# Altium PCB PCB1.PcbDoc (part 1 of 3)
Units mil, origin at the board's own origin, x right, y up, seen from the top; angles counter-clockwise.
Board outline 3550 x 3015 mil, 5 copper layers (Top Layer, GND, Layer 1, Layer 2, Bottom Layer), stack 19.334 mil thick; 291 components, 192 nets, 917 pads, 203 vias.
Unrouted connection lines stored in the file: 51.
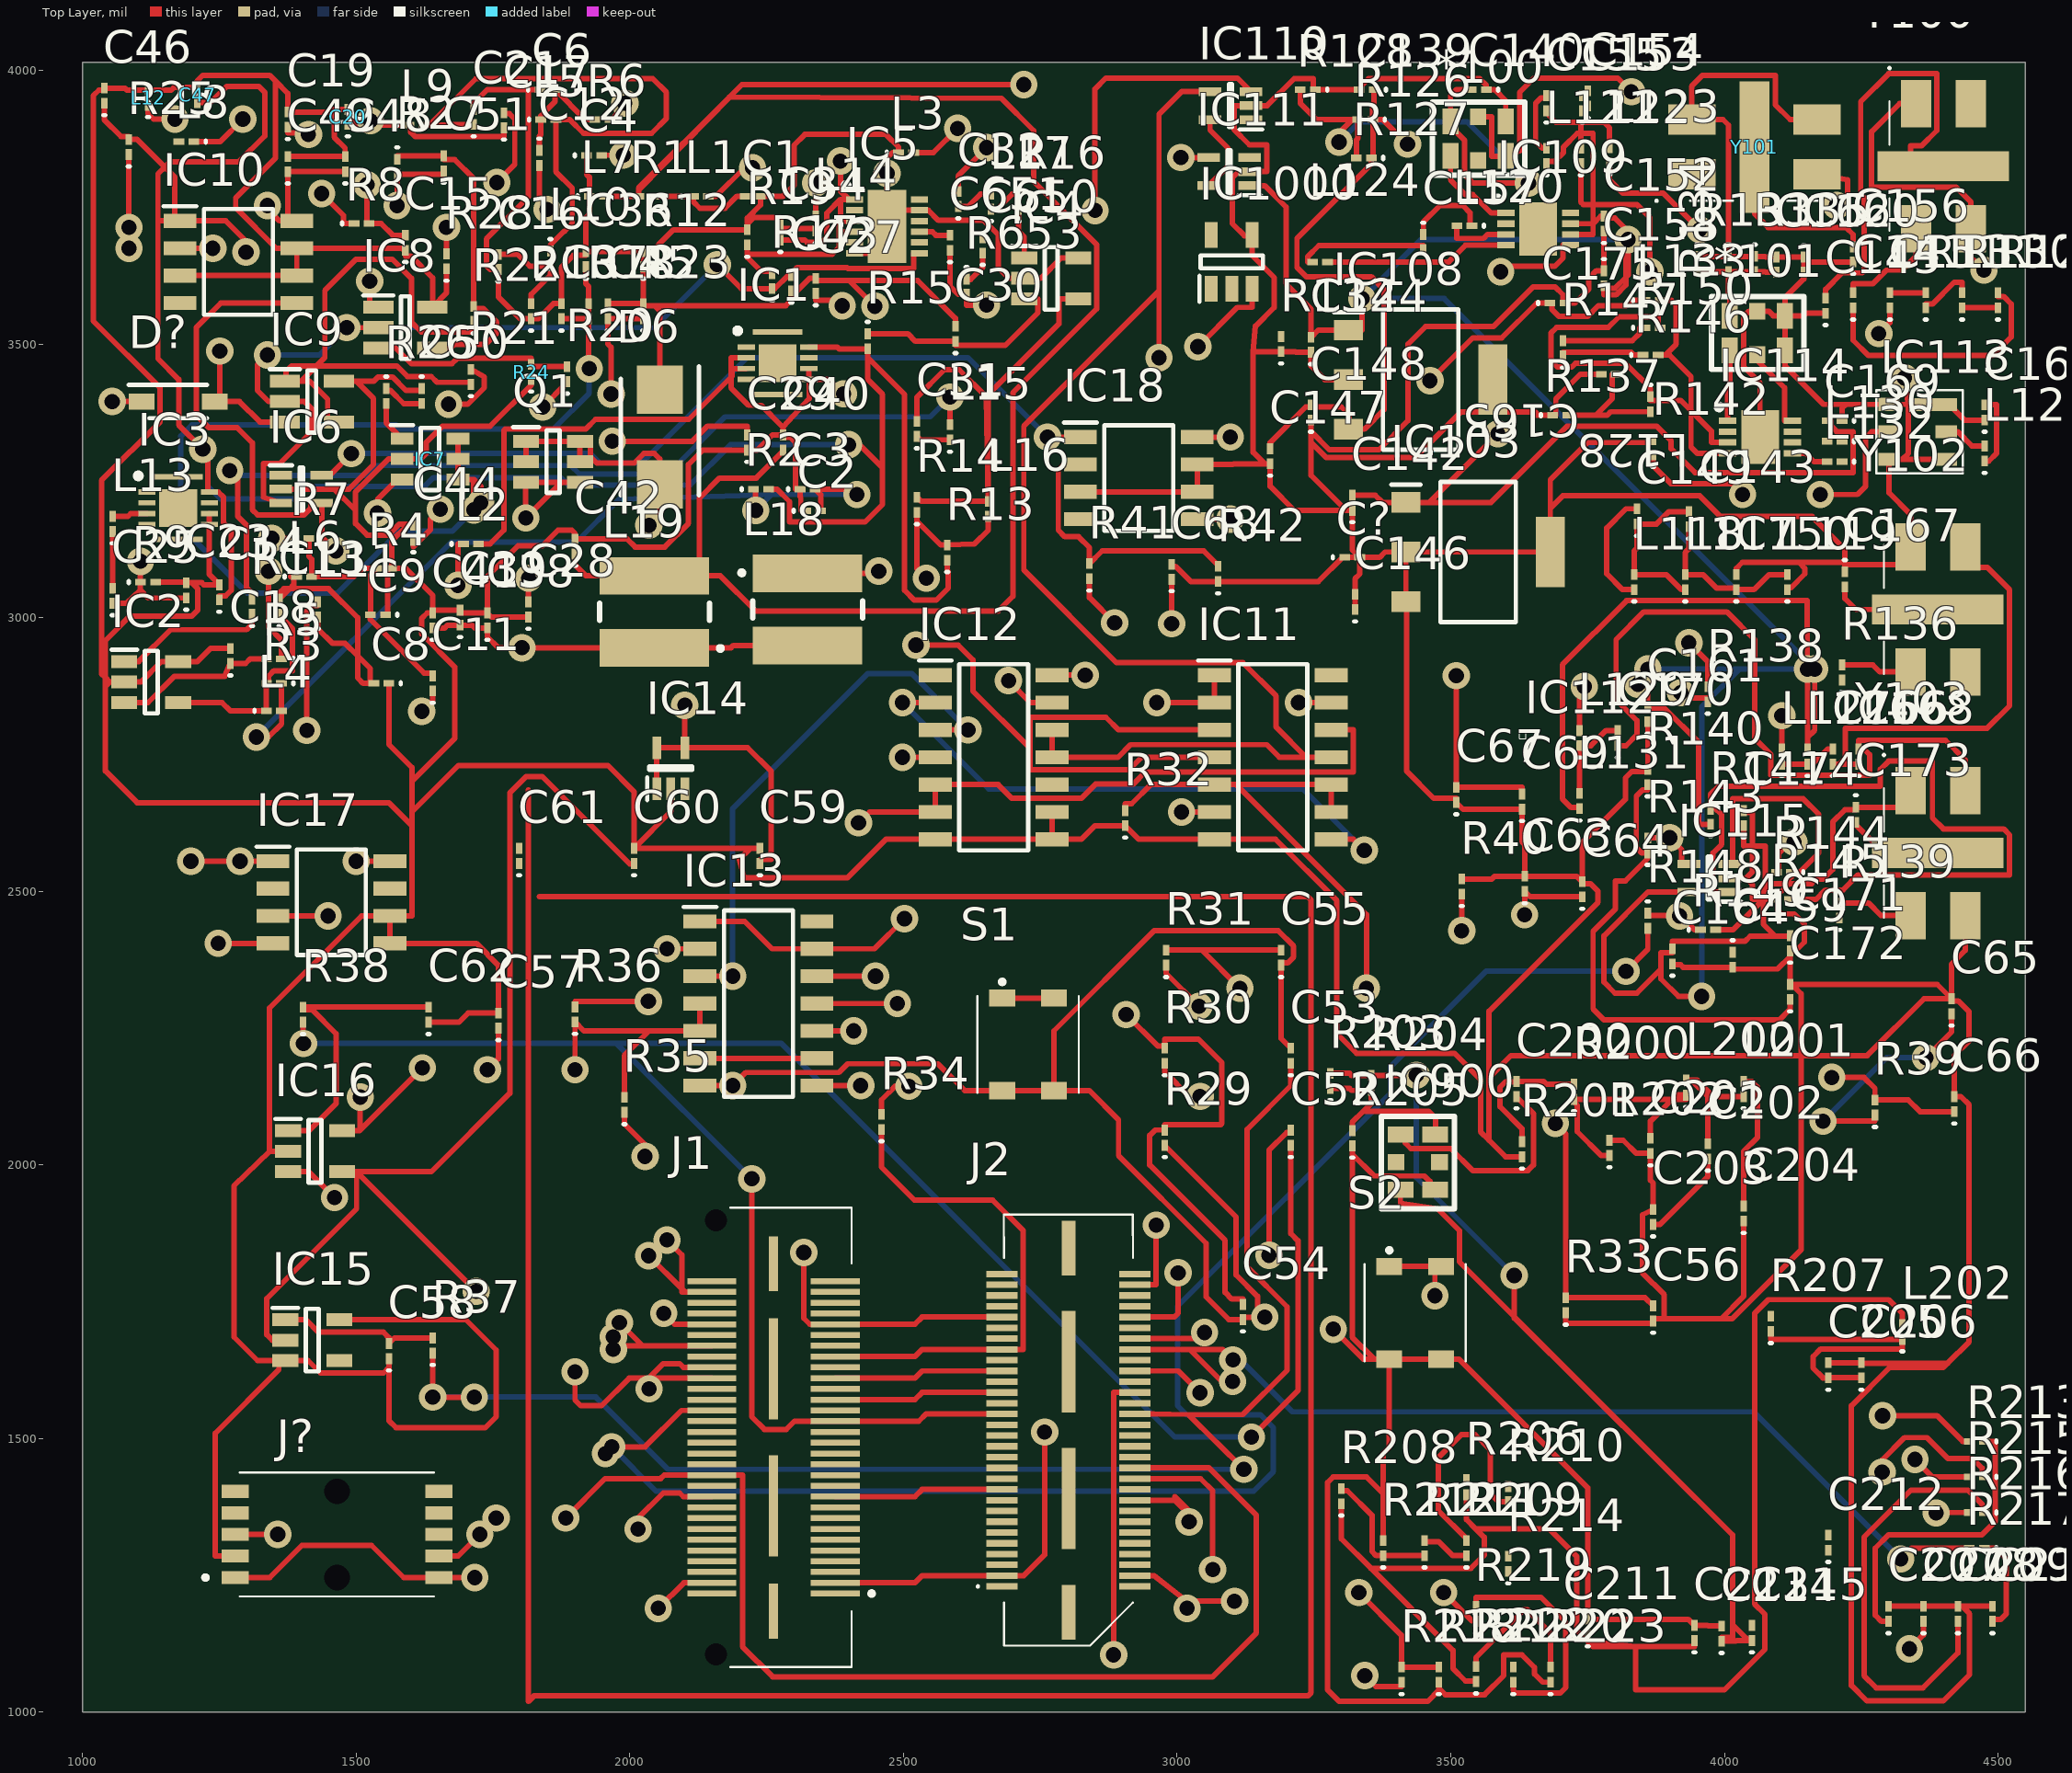
[diagram p0: Top Layer view]
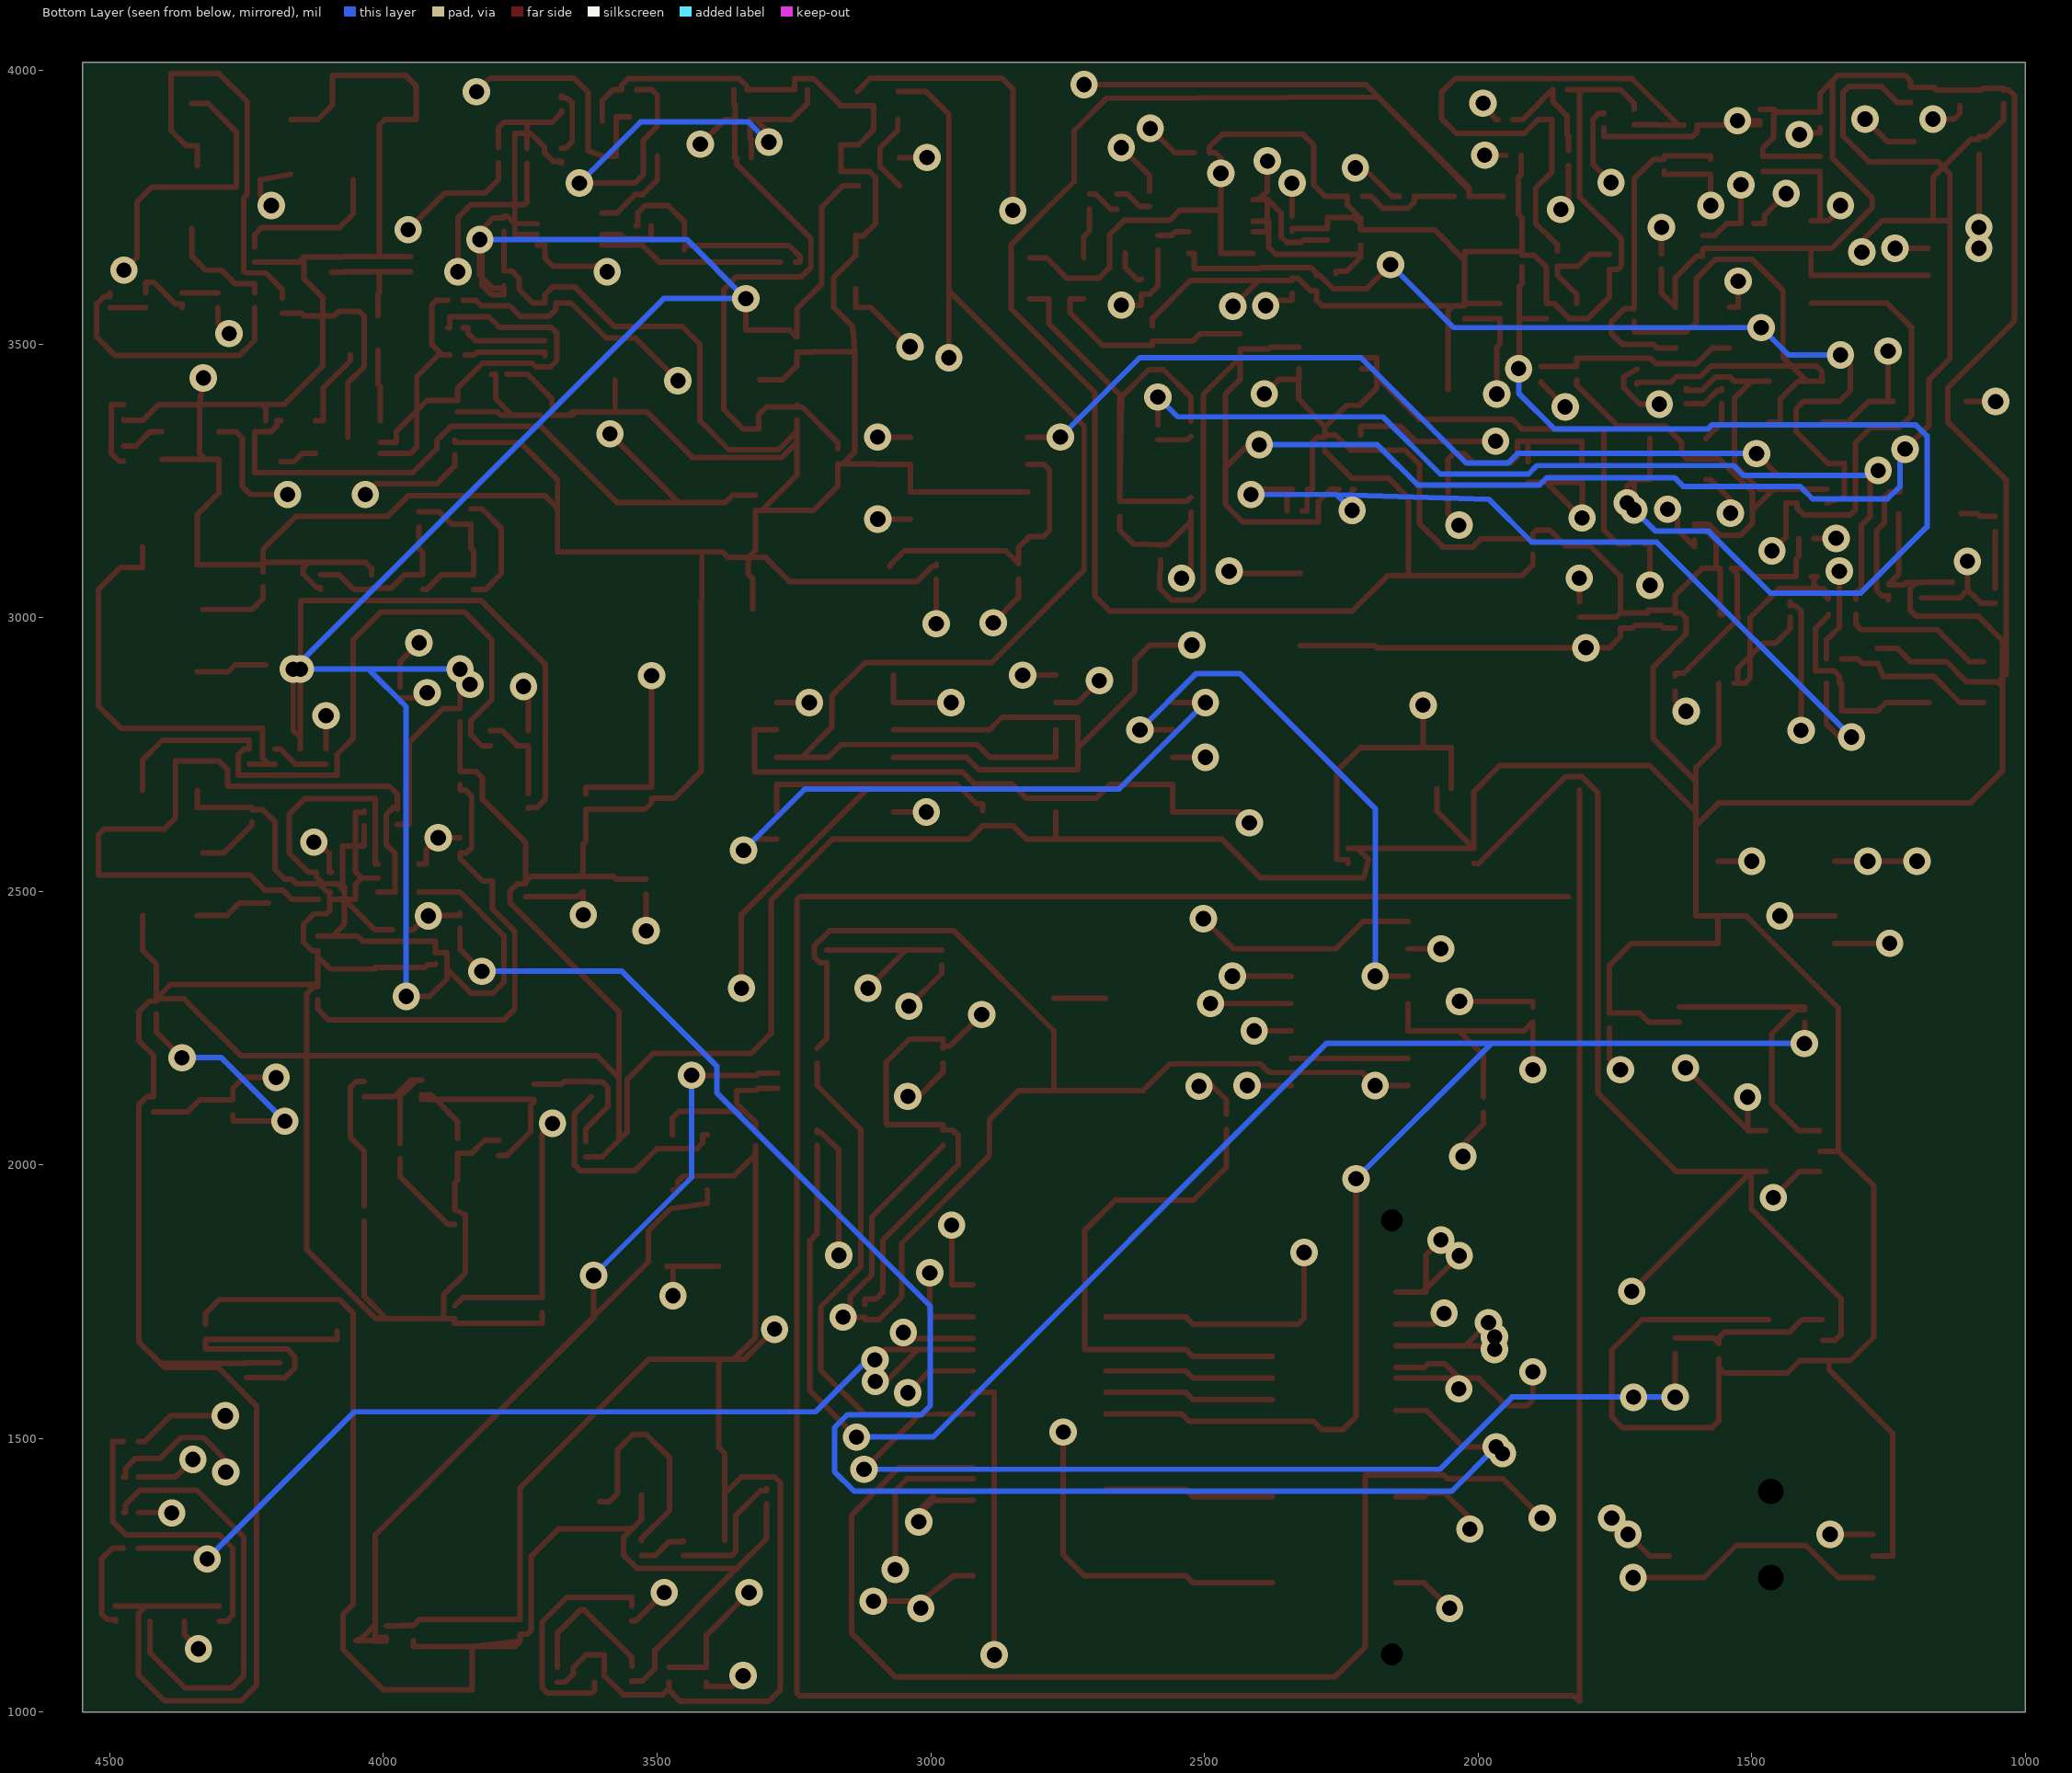
[diagram p1: Bottom Layer view, seen from below]
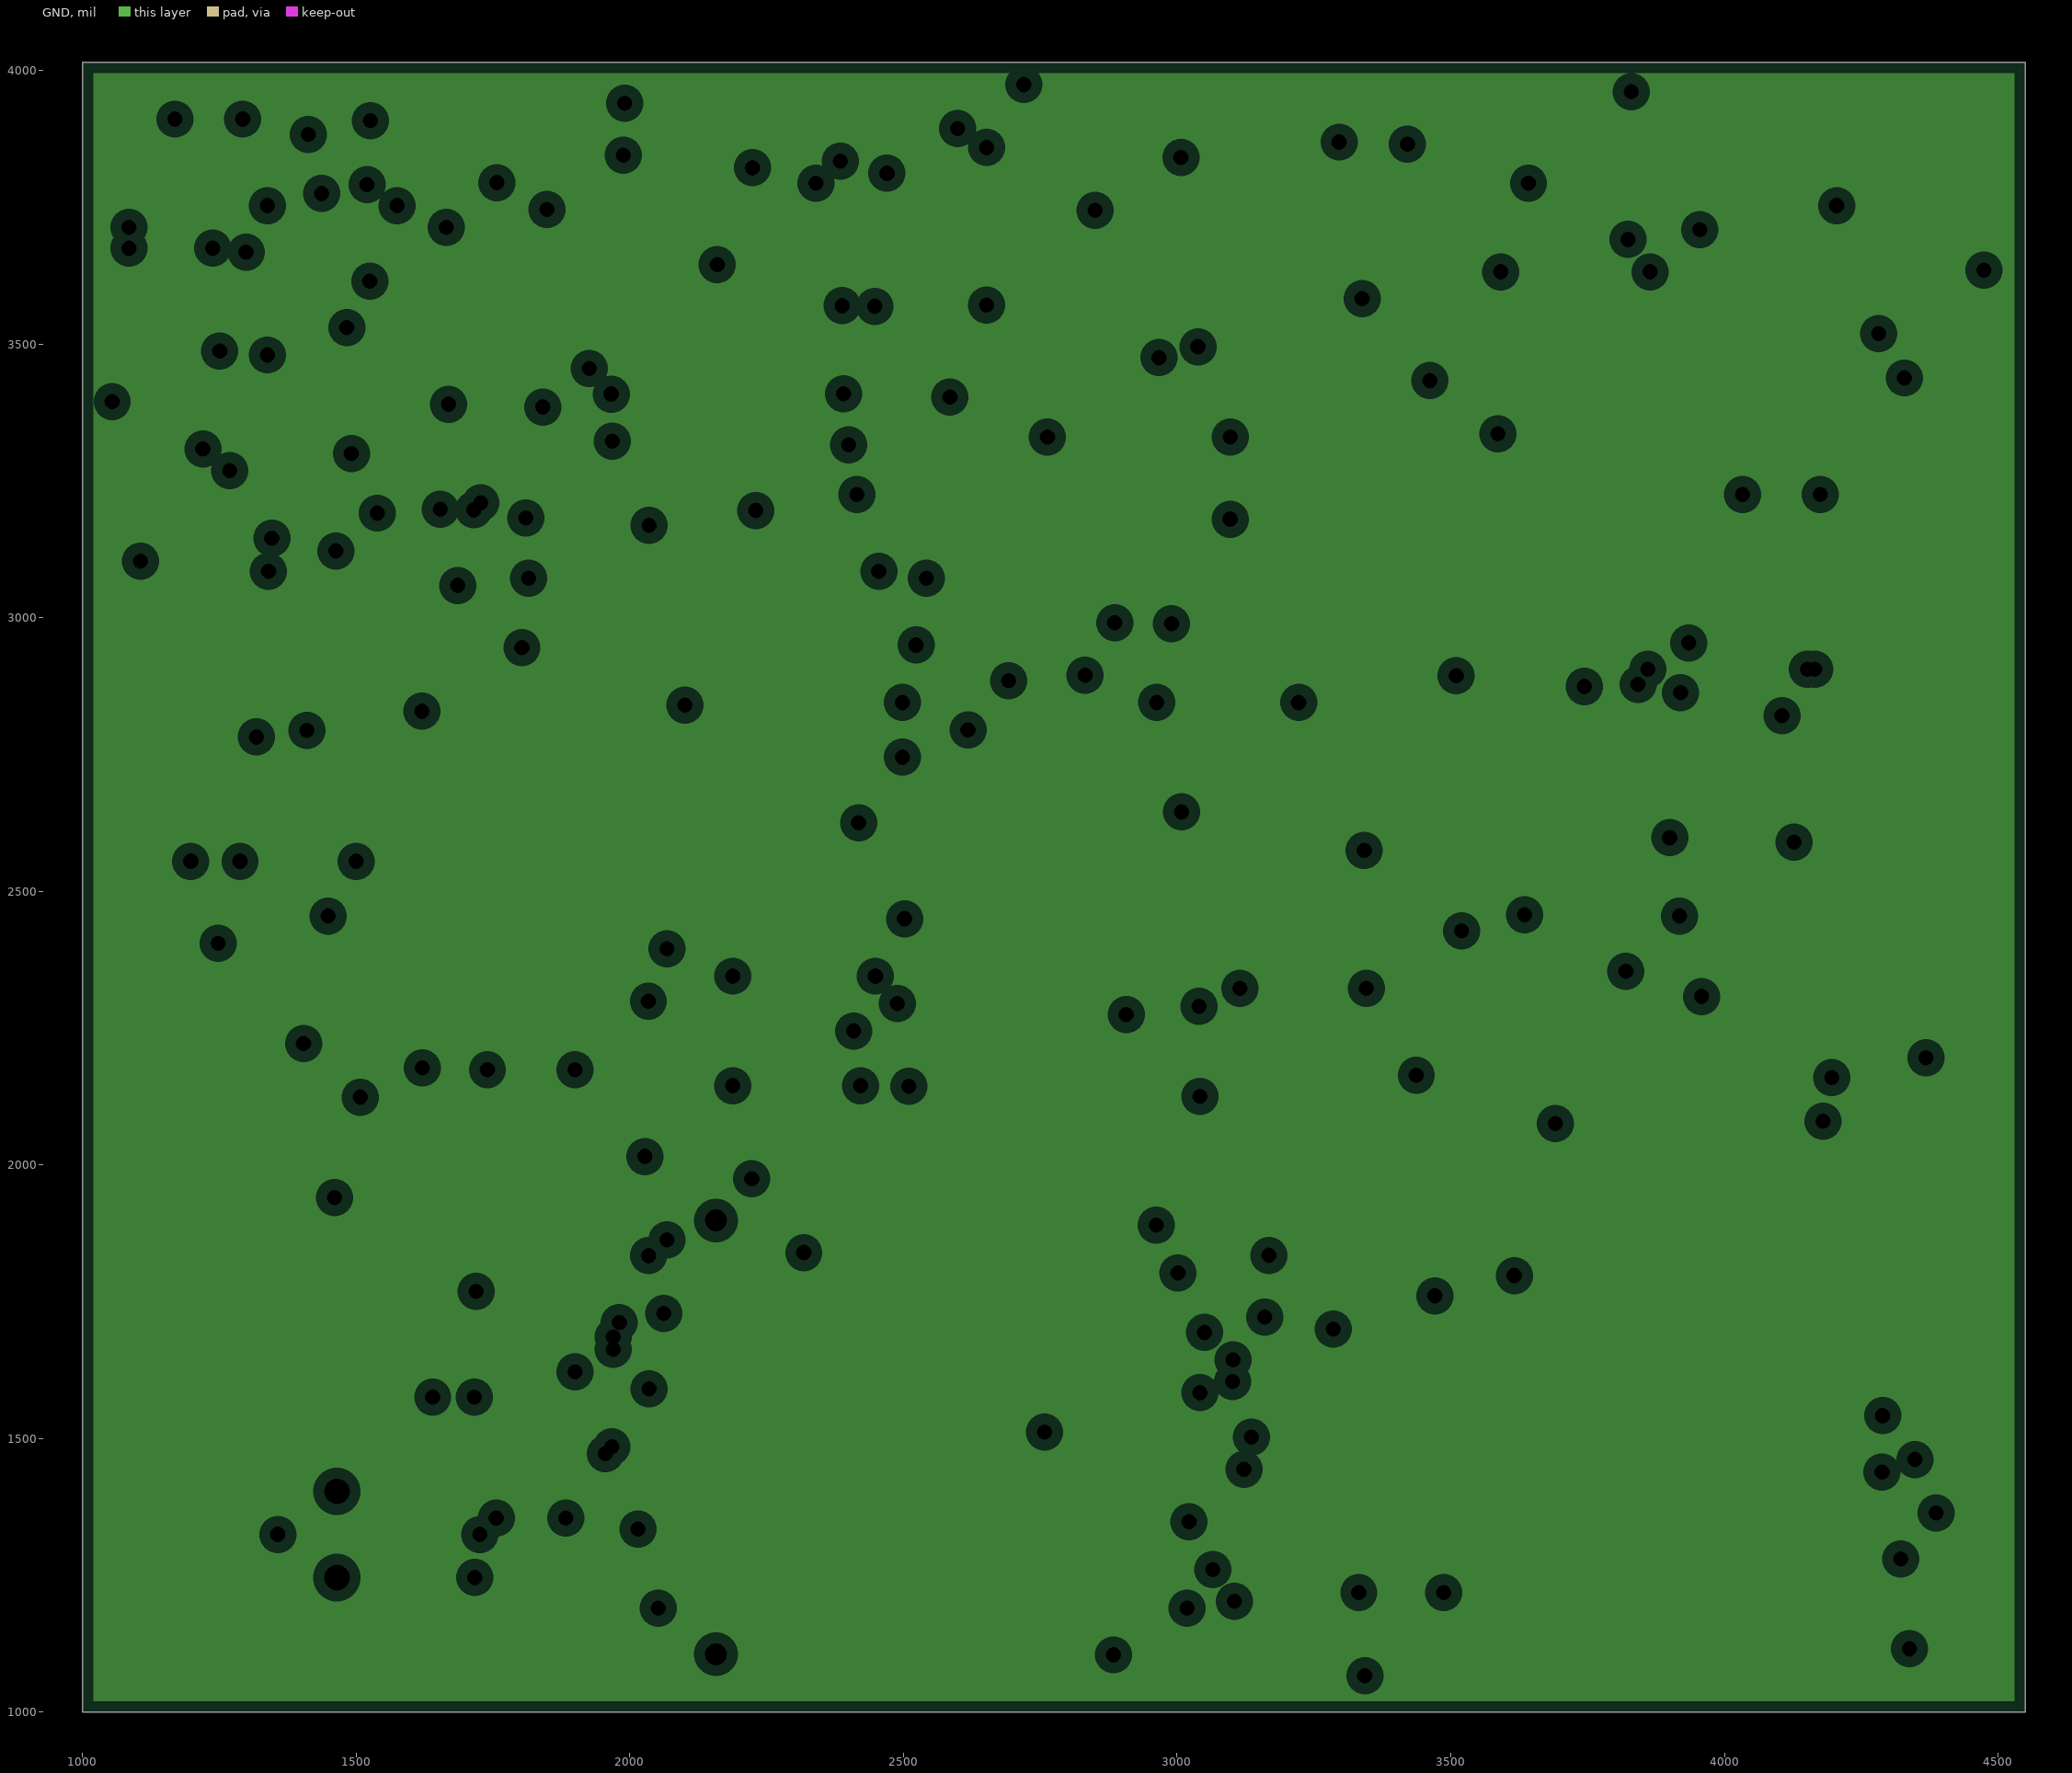
[diagram p2: GND, clearances drawn from the general rule]
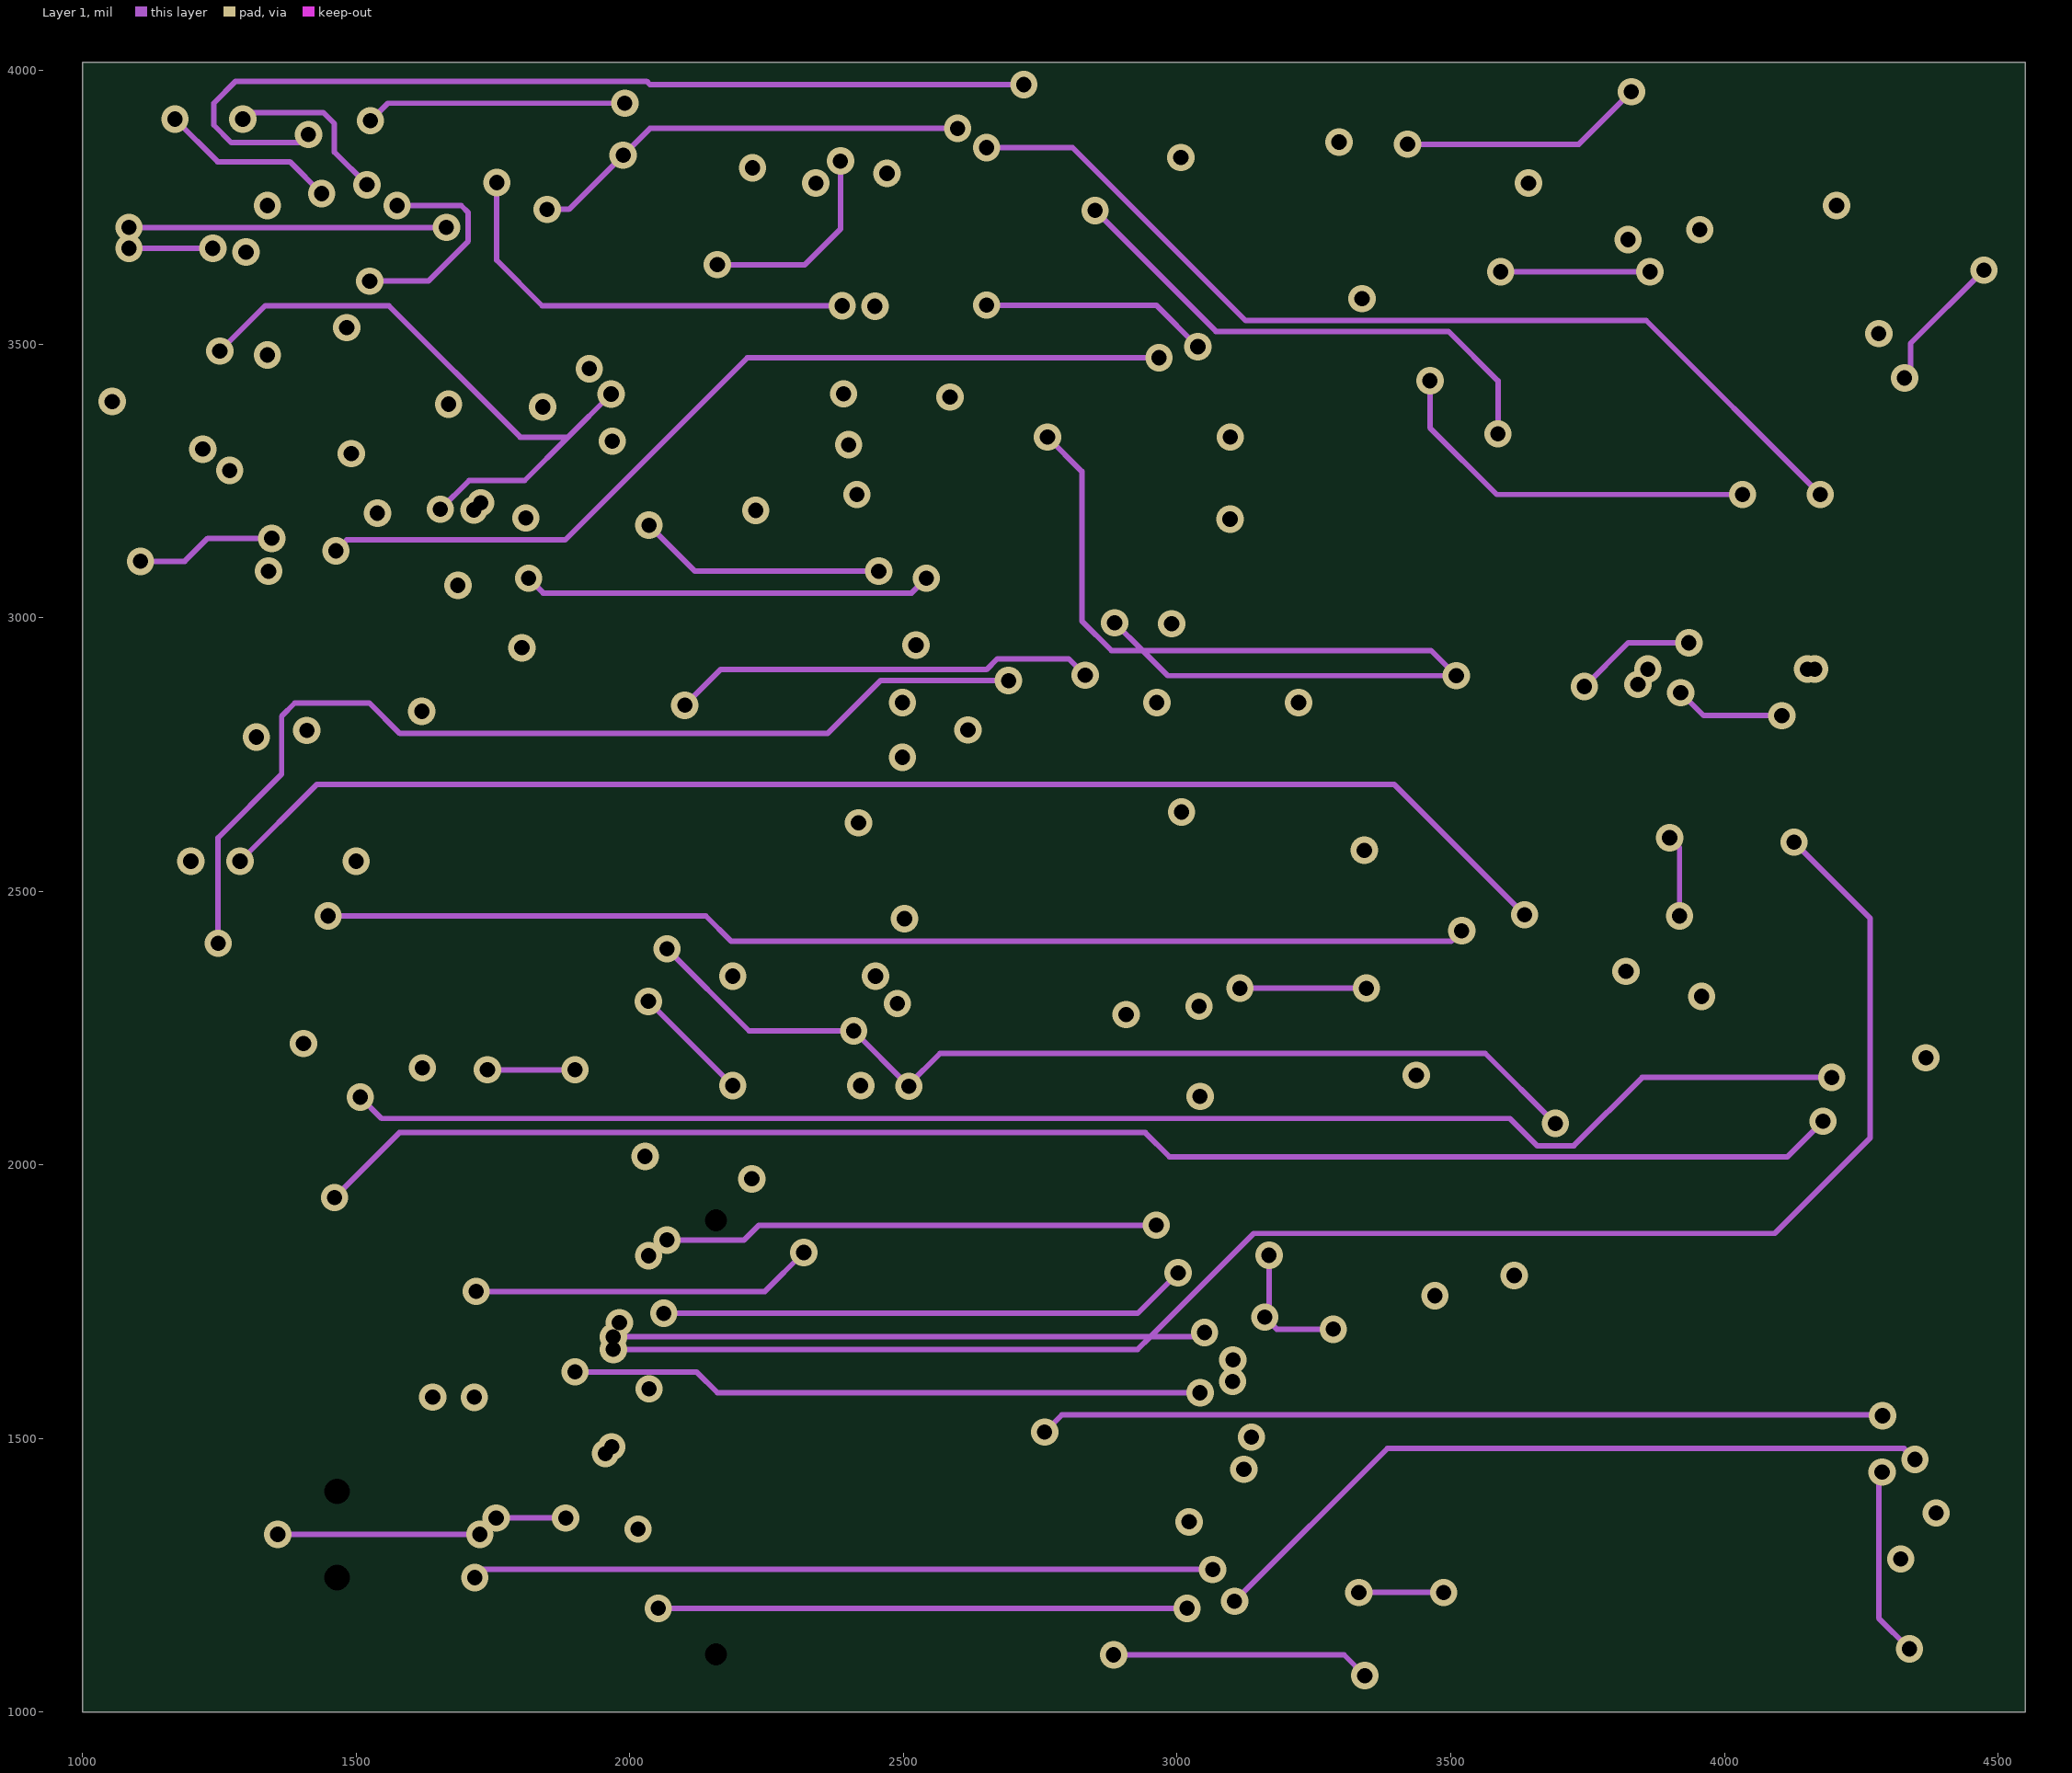
[diagram p3: Layer 1]
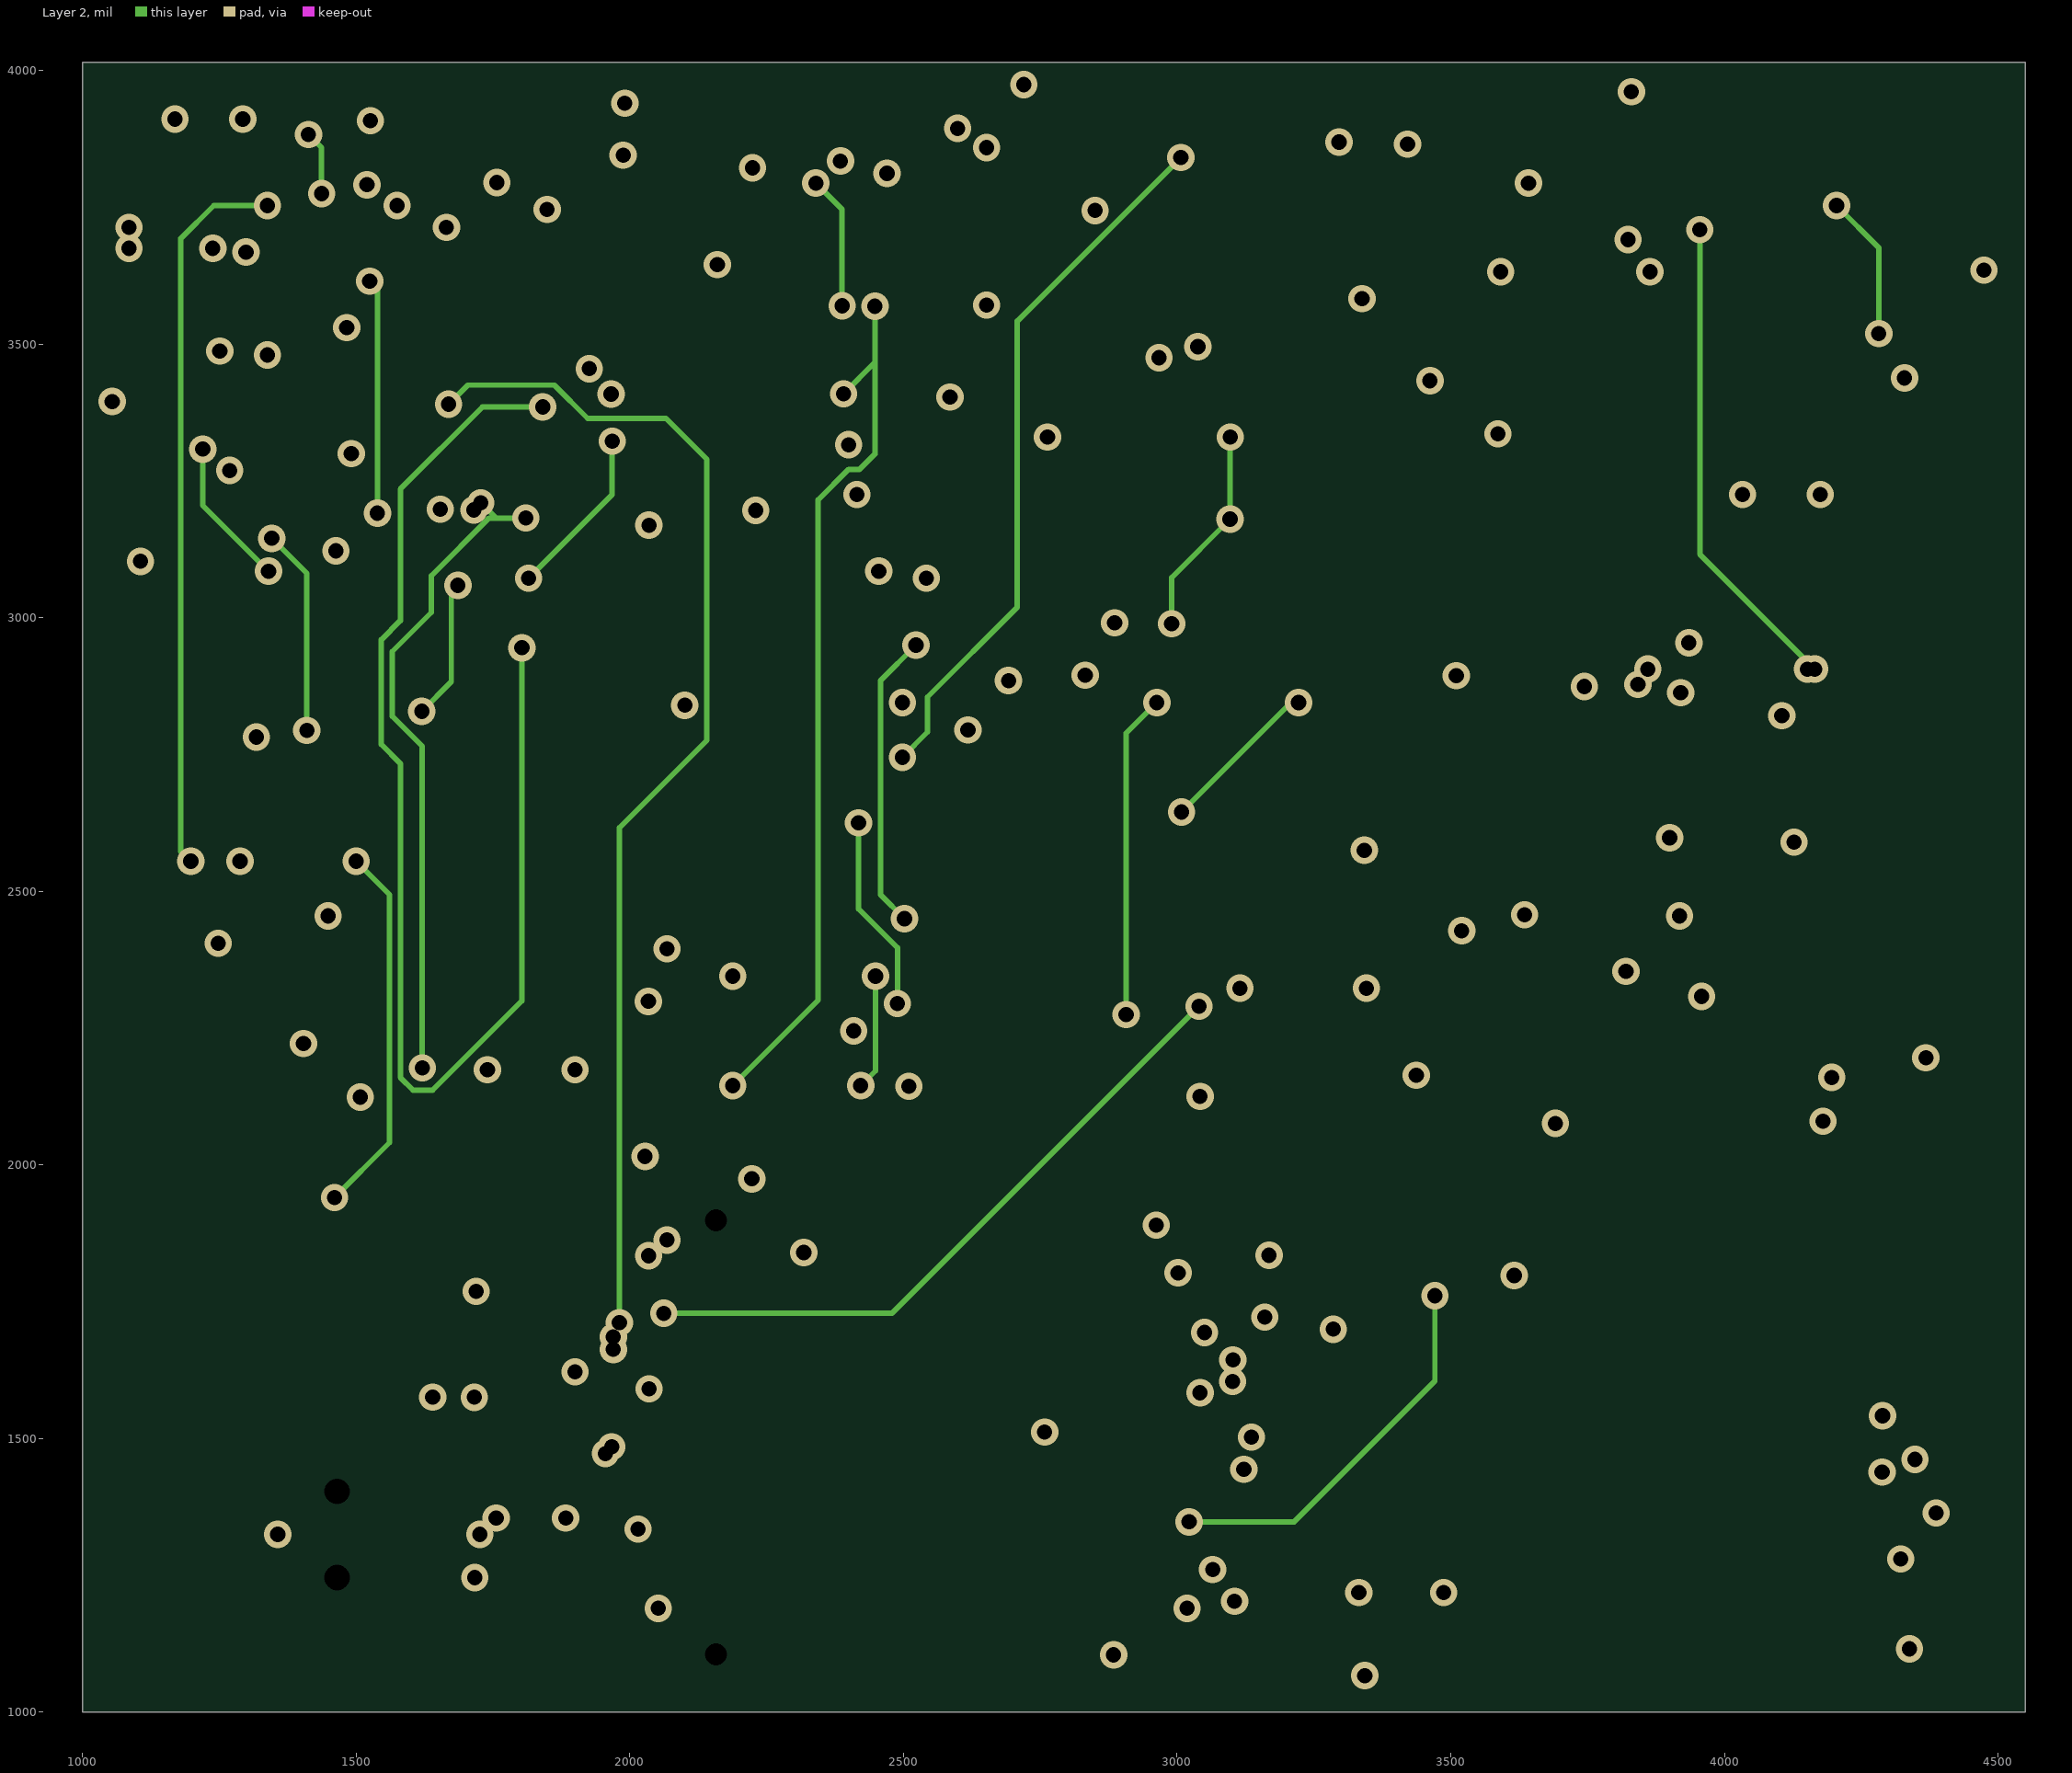
[diagram p4: Layer 2]

## Layer stack, top to bottom
Top Solder: solder mask 0.4, Solder Resist, Dk 3.5
Top Layer: signal copper 1.4
Dielectric 2: prepreg 2.8, PP-006, Dk 4.1
GND: plane copper 1.378
Dielectric 1: core 4, Core-009, Dk 4.5
Layer 1: signal copper 1.378
Dielectric 4: prepreg 2.8, PP-006, Dk 4.1
Layer 2: signal copper 1.378
Dielectric 5: prepreg 2.8, PP-006, Dk 4.1
Bottom Layer: signal copper 1.4
Bottom Solder: solder mask 0.4, Solder Resist, Dk 3.5

## Board outline
1000,1000 4550,1000 4550,4015 1000,4015

## Design rules (kind name [scope] priority, off if disabled: settings)
Clearance [All] p1: gap=10 ignorepadtopadclearanceinfootprint=FALSE except(0: Arc-Hole Track-Hole SMDPad-Hole THPad-Hole Via-Hole Fill-Hole Poly-Hole Region-Hole Text-Hole; 5: Arc-SMDPad Track-SMDPad SMDPad-SMDPad)
DiffPairsRouting [All] p1: maxlimit=10 minlimit=1 mostfreqgap=10 toplayer_minwidth=1 toplayer_maxwidth=15 toplayer_prefwidth=15 midlayer1_minwidth=1 midlayer1_maxwidth=15 midlayer1_prefwidth=15 midlayer2_minwidth=1 midlayer2_maxwidth=15 midlayer2_prefwidth=15 bottomlayer_minwidth=1 bottomlayer_maxwidth=15 bottomlayer_prefwidth=15 maxuncoupledlength=500
PlaneClearance [All] p1: clearance=20
PlaneConnect [All] p1: planeconnectstyle=Relief reliefexpansion=20 reliefentries=4 reliefconductorwidth=10 reliefairgap=10
PolygonConnect [All] p1: connectstyle=Relief reliefconductorwidth=10 reliefentries=4 polygonreliefangle="90 Angle" airgapwidth=10
RoutingVias [All] p1: holewidth=28 width=50 viastyle="Through Hole" minholewidth=28 minwidth=50 maxholewidth=28 maxwidth=50
SolderMaskExpansion [All] p1: expansion=4 istentingtop=FALSE
Width [All] p1: maxlimit=10 minlimit=10 preferedwidth=10
27 further rules are at their usual default settings.

## Classes and differential pairs
component class TELEMETRY: C200 C201 C202 C203 C204 C205 C206 C207 C208 C209 C210 C211 C212 C213 C214 C215 IC200 IC201 IC202 IC203 IC900 L200 L201 L202 R200 R201 R202 R203 R204 R205 R206 R207 R208 R209 R210 R211 R212 R213 R214 R215 R216 R217 R218 R219 R220 R221 R222 R223
component class Sheet1: C52 C53 C54 C55 C56 C57 C58 C59 C60 C61 C62 C63 C64 C65 C66 C67 C68 C69 IC11 IC12 IC13 IC14 IC15 IC16 IC17 IC18 J1 J2 J? R29 R30 R31 R32 R33 R34 R35 R36 R37 R38 R39 R40 R41 R42 S1 S2
component class PA: C1 C2 C3 C4 C6 C8 C9 C11 C12 C13 C14 C15 C16 C17 C18 C19 C20 C21 C23 C25 C27 C28 C29 C30 C31 C32 C34 C36 C37 C38 C39 C40 C41 C42 C43 C44 C45 C46 C47 C48 C49 C50 C51 C650 C651 D6 D? IC1 IC2 IC3 IC4 IC5 IC6 IC7 IC8 IC9 IC10 L1 L2 L3 L4 L5 L6 L7 L8 L9 L10 L11 L12 L13 L14 L15 L16 L17 L18 L19 Q1 R1 R2 R3 R4 R5 R6 R7 R8 R9 R10 R11 R12 R13 R14 R15 R16 R17 R18 R19 R20 R21 R22 R23 R24 R25 R26 R27 R28 R653
component class "Mixers and IF": *100 *101 C139 C140 C141 C142 C143 C144 C145 C146 C147 C148 C149 C150 C151 C152 C153 C154 C155 C156 C157 C158 C159 C160 C161 C162 C163 C164 C165 C166 C167 C168 C169 C170 C? IC103 IC108 IC109 IC110 IC111 IC112 IC113 IC114 L117 L118 L119 L120 L121 L122 L123 L124 L125 L126 L127 L128 L129 L130 L131 R126 R127 R128 R129 R130 R131 R132 R133 R134 R135 R136 R137 R138 Y100 Y101 Y102 Y103

## Components (designator, comment, footprint, x,y, rotation, side; value= is the part's Value field where it differs from the comment)
*100 "MQF326D REp" MQF326D 3600.27,3907.17 r180 top
*101 "MQF326D REp" MQF326D 4110.27,3552.17 r180 top
C1 "Cap" 0603 2225,3770 r180 top value=33pF
C2 "Cap" 0603 2335,3195 r0 top value=1uF
C3 "Cap" 0603 2325,3235 r0 top value=470pF
C4 "Cap" 0603 1935,3845 r0 top value=12pF
C6 "Cap" 0603 1850,3965 r0 top value=5.1pF
C8 "Cap" 0603 1546.22,2880 r180 top value=10pF
C9 "Cap" 0603 1540,3005 r180 top value=5.1pF
C11 "Cap" 0603 1640,2880 r90 top value=470pF
C12 "Cap" 0603 1835,3840 r270 top value=470pF
C13 "Cap" 0603 1360,3020 r90 top value=470pF
C14 "Cap" 0603 1250,3046.22 r90 top value=10nF
C15 "Cap" 0603 1590,3685 r90 top value=33pF
C16 "Cap" 0603 1760,3650 r90 top value=6.8pF
C17 "Cap" 0603 1770,3908.78 r90 top value=470pF
C18 "Cap" 0603 1270,2930 r90 top value=470pF
C19 "Cap" 0603 1375,3910 r90 top value=470pF
C20 "Cap" 0603 1485,3915 r90 top value=5.1pF
C21 "Cap" 0603 1715,3915 r90 top value=16pF
C23 "Cap" 0603 1190,3050 r90 top value=5.1pF
C25 "Cap" 0603 1055,3040 r90 top value=470pF
C27 "Cap" 0603 2340,3606.22 r90 top value=12pF
C28 "Cap" 0603 1815,3015 r90 top value=470pF
C29 "Cap" 0603 2215,3320 r90 top value=1uF
C30 "Cap" 0603 2595,3518.78 r90 top value=470pF
C31 "Cap" 0603 2525,3345 r90 top value=470pF
C32 "Cap" 0603 2600,3765 r90 top value=470pF
C34 "Cap" 0603 2275,3703.78 r90 top value=1uF
C36 "Cap" 0603 1920,3655 r90 top value=4.7uF
C37 "Cap" 0603 1875,3560 r90 top value=4.7uF
C38 "Cap" 0603 1740,2995 r90 top value=22uF
C39 "Cap" 0603 1690,3000 r90 top value=22uF
C40 "Cap" 0603 2280,3320 r90 top value=47uF
C41 "Cap" 0603 1640,2995 r90 top value=.1uF
C42 "Cap" 0603 1900,3130 r90 top value=47uF
C43 "Cap" 0603 2295,3611.22 r90 top value=1uF
C44 "Cap" 0603 1605,3155 r90 top value=4.7uF
C45 "Cap" 0603 1960,3560 r90 top value=4.7uF
C46 "Cap" 0603 1040,3953.78 r90 top value=4.7uF
C47 "Cap" 0603 1210,3955 r90 top value=4.7uF
C48 "Cap" 0603 1480,3828.78 r90 top value=1uF
C49 "Cap" 0603 1375,3828.78 r90 top value=470pF
C50 "Cap" 0603 1620,3405 r270 top value=220pF
C51 "Cap" 0603 1660,3830 r90 top value=.1uF
C52 "Cap" 0603 3207.76,2049.65 r90 top value=470pF
C53 "Cap" 0603 3207.76,2199.65 r90 top value=470pF
C54 "Cap" 0603 3120,1731.22 r90 top value=470pF
C55 "Cap" 0603 3190,2378.78 r90 top value=470pF
C56 "Cap" 0603 3870,1728.78 r90 top value=470pF
C57 "Cap" 0603 1760,2263.78 r90 top value=470pF
C58 "Cap" 0603 1560,1660 r90 top value=470pF
C59 "Cap" 0603 2237.76,2564.65 r90 top value=.1uF
C60 "Cap" 0603 2007.76,2564.65 r90 top value=.1uF
C61 "Cap" 0603 1797.76,2564.65 r90 top value=.1uF
C62 "Cap" 0603 1632.76,2274.65 r90 top value=470pF
C63 "Cap" 0603 3635,2513.78 r90 top value=4.7uF
C64 "Cap" 0603 3740,2503.78 r90 top value=4.7uF
C65 "Cap" 0603 4415,2290 r90 top value=.1uF
C66 "Cap" 0603 4420,2111.22 r90 top value=.1uF
C67 "Cap" 0603 3510,2676.22 r90 top value=4.7uF
C68 "Cap" 0603 2990,3083.78 r90 top value=1uF
C69 "Cap" 0603 3630,2663.78 r90 top value=4.7uF
C139 "Cap" 0603 3346.22,3965 r180 top value=470pF
C140 "Cap" 0603 3551.22,3965 r180 top value=1nF
C141 "Cap" 0603 4235,3580 r90 top value=470pF
C142 "Cap" 0603 3320,3210 r90 top value=1nF
C143 "Cap" 0603 3935,3180 r90 top value=16pF
C144 "Cap" 0603 3245,3498.78 r90 top value=1nF
C145 "Cap" 0603 4185,3570 r90 top value=1.8pF
C146 "Cap" 0603 3325,3028.78 r90 top value=4.7uF
C147 "Cap" 0603 3170,3295 r90 top value=4.7uF
C148 "Cap" 0603 3245,3375 r90 top value=4.7uF
C149 "Cap" 0603 3840,3185 r90 top value=82pF
C150 "Cap" 0603 4021.67,3065 r90 top value=82pF
C151 "Cap" 0603 4302,3580 r90 top value=470pF
C152 "Cap" 0603 3780,3720 r90 top value=1nF
C153 "Cap" 0603 3740,3940 r90 top value=470pF
C154 "Cap" 0603 3750,3948.78 r90 top value=470pF
C155 "Cap" 0603 3675,3940 r90 top value=.5pF
C156 "Cap" 0603 4235,3663.78 r90 top value=1.8pF
C157 "Cap" 0603 3450,3686.22 r270 top value=22pF
C158 "Cap" 0603 3780,3620 r270 top value=1nF
C159 "Cap" 0603 4015,2375 r270 top value=470pF
C160 "Cap" 0603 4145,3645 r270 top value=470pF
C161 "Cap" 0603 3860,2823.78 r90 top value=1.8pF
C162 "Cap" 0603 4095,3645 r270 top value=1nF
C163 "Cap" 0603 4475,3375 r90 top value=3.9pF
C164 "Cap" 0603 3905,2381.22 r90 top value=1nF
C165 "Cap" 0603 3788.78,3445 r0 top value=1nF
C166 "Cap" 0603 4198.33,2746.22 r90 top value=470pF
C167 "Cap" 0603 4220,3070 r270 top value=1.8pF
C168 "Cap" 0603 4245,2746.22 r90 top value=1.2pF
C169 "Cap" 0603 4201.22,3360 r180 top value=1nF
C170 "Cap" 0603 3805,2780 r90 top value=470pF
C171 "Cap" 0603 4120,2405 r90 top value=1nF
C172 "Cap" 0603 4120,2316.22 r90 top value=1nF
C173 "Cap" 0603 4240,2640 r270 top value=1.8pF
C174 "Cap" 0603 4035,2633.78 r90 top value=1nF
C175 "Cap" 0603 3695,3575 r0 top value=1nF
C200 "Cap" 0603 3620,2138.78 r90 top value=10nF
C201 "Cap" 0603 3865,2035 r90 top value=180pF
C202 "Cap" 0603 3970,2025 r90 top value=560pF
C203 "Cap" 0603 3870,1905 r90 top value=270pF
C204 "Cap" 0603 4035,1911.22 r90 top value=270pF
C205 "Cap" 0603 4190,1625 r90 top value=1nF
C206 "Cap" 0603 4250,1625 r90 top value=4.7uF
C207 "Cap" 0603 4300,1180 r90 top value=2.2pF
C208 "Cap" 0603 4363.33,1180 r90 top value=2.2pF
C209 "Cap" 0603 4426.67,1180 r90 top value=2.2pF
C210 "Cap" 0603 4490,1180 r90 top value=2.2pF
C211 "Cap" 0603 3750,1156.22 r90 top value=1nF
C212 "Cap" 0603 4190,1310 r90 top value=10nF
C213 "Cap" 0603 3945,1145 r90 top value=1nF
C214 "Cap" 0603 3995,1143.78 r90 top value=4.7uF
C215 "Cap" 0603 4050,1145 r90 top value=4.7uF
C650 "Cap" 0603 2645,3680 r90 top value=39pF
C651 "Cap" 0603 2585,3685 r90 top value=39pF
C? "Cap" 0603 3320,3110 r0 top value=4.7uF
D6 "MBRS120T3G" DIOM5436X247N 2055,3330 r270 top
D? "BAT46W-7-F" SOD3716X145N 1175,3395 r0 top
IC1 "RFPA0133TR7" QFN50P300X300X86-17N-D 2270,3465 r0 top
IC2 "RF2878SR" SOT95P280X159-5N 1125.79,2882.4 r0 top
IC3 "RFPA0133TR7" QFN50P300X300X86-17N-D 1175,3200 r0 top
IC4 "RF2878SR" SOT95P280X159-5N 2770,3620 r0 top
IC5 "LTC5533EDE#PBF" SON50P300X400X85-13N-D 2470,3715 r0 top
IC6 "FPF2000" SOT65P210X110-5N 1400,3235 r0 top
IC7 "LTC1772CS6#TRMPBF" SOT95P280X100-6N 1635,3290 r0 top
IC8 "MCP6231UT-E_OT" SOT95P270X145-5N 1590,3530 r0 top
IC9 "MCP6231UT-E_OT" SOT95P270X145-5N 1419.21,3395 r0 top
IC10 "LT1963AES8-3.3#PBF" SOIC127P599X175-8N 1285,3650 r0 top
IC11 "SN74HC00D" SOIC127P600X175-14N 3175,2745 r0 top
IC12 "MM74HC02M" SOIC127P600X175-14N 2665,2745 r0 top
IC13 "SN74HC00D" SOIC127P600X175-14N 2235,2295 r0 top
IC14 "FPF2000" SOT65P210X110-5N 2075,2725 r90 top
IC15 "TMP36GRTZ-REEL7" SOT95P280X145-5N 1420,1680 r0 top
IC16 "INA194AIDBVT" SOT95P280X145-5N 1425,2025 r0 top
IC17 "FPF2700MX" SOIC127P600X175-8N 1455,2480 r0 top
IC18 "LT1963AES8-3.3#PBF" SOIC127P599X175-8N 2930,3255 r0 top
IC103 "LT1963EST-2.5" SOT230P700X180-4N 3550,3120 r0 top
IC108 "LT1963EST-2.5" SOT230P700X180-4N 3445,3435 r0 top
IC109 "LT5560EDD#PBF" SON50P300X300X80-9N-D 3660,3710 r0 top
IC110 "FPF2000" SOT65P210X110-5N 3097.6,3935.59 r180 top
IC111 "FPF2004" SOT65P210X110-5N 3095,3815 r180 top
IC112 "rf2637" RF2637 3630,2783.27 r90 top
IC113 "AFS434S3-T" AFS434S3 4275.7,3262.34 r0 top
IC114 "LT5560EDD#PBF" SON50P300X300X80-9N-D 4065,3330 r0 top
IC115 "MCP6231UT-E_LT" SOT65P210X110-5N 3972.6,2524.41 r180 top
IC900 "MQF326D REp" MQF326D 3471.71,1954.73 r90 top
IC1000 "RF2878SR" SOT95P280X159-5N 3100,3650 r90 top
J1 "QSH-030-01-L-D-A-K" QSH03001LDAK 2262.8,1502.32 r90 top
J2 "QTH-030-02-L-D-A" QTH03002LDA 2801.5,1515.47 r90 top
J? "FSI-105-06-L-D-AD-TR" FSI10506LDADTR 1465,1325 r90 top
L1 "Inductor" 0603 2130,3770 r0 top value=8.7nH
L2 "Inductor" 0603 1710,3135 r0 top value=18nH
L3 "Inductor" 0603 2505,3850 r0 top value=10.4nH
L4 "Inductor" 0603 1350,2830 r0 top value=18nH
L5 "Inductor" 0603 1851.22,3910 r0 top value=25nH
L6 "Inductor" 0603 1405,3075 r0 top value=25nH
L7 "Inductor" 0603 1940,3770 r0 top value=18nH
L8 "Inductor" 0603 1190,3870 r180 top value=8.7nH
L9 "Inductor" 0603 1610,3900 r0 top value=25nH
L10 "Inductor" 0603 1855,3656.22 r270 top value=18nH
L11 "Inductor" 0603 1430,3015 r90 top value=25nH
L12 "Inductor" 0603 1120,3950 r90 top value=18nH
L13 "Inductor" 0603 1055,3171.22 r90 top value=18nH
L14 "Inductor" 0603 2340,3720 r90 top value=10.4nH
L15 "Inductor" 0603 2585,3338.78 r90 top value=39nH
L16 "Inductor" 0603 2655,3198.78 r270 top value=18nH
L17 "Inductor" 0603 2660,3760 r90 top value=39nH
L18 "MSS5131-472MLB" MSS5131 2325,3015 r0 top
L19 "MSS5131-103MLB" MSS5131 2045,3010.75 r180 top
L117 "Inductor" 0603 3928.33,3065 r90 top value=2508_23
L118 "Inductor" 0603 3835,3065 r90 top value=1508_13
L119 "Inductor" 0603 4115,3065 r90 top value=1508_23
L120 "Inductor" 0603 3525,3716.22 r180 top value=18nH
L121 "Inductor" 0603 3675,3843.78 r90 top value=2.7uH
L122 "Inductor" 0603 3737.5,3843.78 r90 top value=2.7uH
L123 "Inductor" 0603 3790,3845 r90 top value=8.2uH
L124 "Inductor" 0603 3261.22,3650 r180 top value=18nH
L125 "Inductor" 0603 4475,3300 r90 top value=8.2nH
L126 "Inductor" 0603 4151.67,2746.22 r90 top value=8.2uH
L127 "Inductor" 0603 4105,2746.22 r90 top value=2.2uH
L128 "Inductor" 0603 3865,3390 r270 top value=1.5uH
L129 "Inductor" 0603 3735,2780 r90 top value=2.2uH
L130 "Inductor" 0603 4201.22,3322.5 r180 top value=68nH
L131 "Inductor" 0603 3735,2665 r90 top value=8.2uH
L132 "Inductor" 0603 4201.22,3285 r180 top
L133 "Inductor" 0603 3868.78,3580 r0 top value=1.5uH
L200 "Inductor" 0603 3930,2141.22 r90 top value=120nH
L201 "Inductor" 0603 4035,2138.78 r90 top value=47nH
L202 "Inductor" 0603 4325,1695 r90 top value=330nH
Q1 "FDC638P" SOT95P280X110-6N 1860,3285 r0 top
R1 "Res1" 0603 2030,3770 r0 top value=10
R2 "Res1" 0603 2240,3235 r0 top value=560
R3 "Res1" 0603 1350,2880 r180 top value=510
R4 "Res1" 0603 1551.22,3090 r0 top value=200
R5 "Res1" 0603 1350,2925 r180 top value=1.8k
R6 "Res1" 0603 1950,3910 r0 top value=100
R7 "Res1" 0603 1400,3145 r180 top value=100
R8 "Res1" 0603 1510,3720 r0 top value=10
R9 "Res1" 0603 1120,3065 r0 top value=200
R10 "Res1" 0603 1820,3560 r90 top value=1.5k
R11 "Res1" 0603 1310,3020 r90 top value=15
R12 "Res1" 0603 2025,3655 r90 top value=49.9
R13 "Res1" 0603 2580,3118.78 r90 top value=1.2k
R14 "Res1" 0603 2525,3206.22 r90 top value=510
R15 "Res1" 0603 2435,3505 r270 top value=2k
R16 "Res1" 0603 2710,3760 r90 top value=15
R17 "Res1" 0603 2260,3615 r90 top value=68k
R18 "Res1" 0603 1925,3560 r90 top value=.03
R19 "Res1" 0603 2215,3695 r90 top value=12k
R20 "Res1" 0603 1885,3445 r90 top value=100k
R21 "Res1" 0603 1710,3440 r90 top value=4.7k
R22 "Res1" 0603 1715,3555 r90 top value=1.8k
R23 "Res1" 0603 2025,3560 r90 top value=470k
R24 "Res1" 0603 1820,3448.78 r90 top value=200k
R25 "Res1" 0603 1085,3860 r90 top value=5.11k
R26 "Res1" 0603 1555,3405 r270 top value=10k
R27 "Res1" 0603 1575,3823.78 r270 top value=300k
R28 "Res1" 0603 1665,3651.22 r90 top value=3.83k
R29 "Res1" 0603 2977.76,2049.65 r90 top value=1M
R30 "Res1" 0603 2977.76,2199.65 r90 top value=100
R31 "Res1" 0603 2980,2378.78 r90 top value=100
R32 "Res1" 0603 2905,2633.78 r90 top value=1M
R33 "Res1" 0603 3710,1743.78 r90 top value=1M
R34 "Res1" 0603 2460,2078.78 r90 top value=100
R35 "Res1" 0603 1990,2110 r90 top value=100
R36 "Res1" 0603 1900,2275 r90 top value=1M
R37 "Res1" 0603 1640,1670 r90 top value=100
R38 "Res1" 0603 1402.76,2274.65 r90 top value=100
R39 "Res1" 0603 4275,2105 r90 top value=.1
R40 "Res1" 0603 3520,2508.78 r90 top value=430k
R41 "Res1" 0603 2840,3085 r90 top value=5.76k
R42 "Res1" 0603 3075,3080 r90 top value=3.83k
R126 "Res1" 0603 3343.78,3910 r180 top value=TBD
R127 "Res1" 0603 3341.22,3840 r180 top value=10k
R128 "Res1" 0603 3238.78,3965 r180 top value=15k
R129 "Res1" 0603 4500,3580 r90 top value=470
R130 "Res1" 0603 4434,3580 r90 top value=2.2k
R131 "Res1" 0603 4368,3580 r90 top value=470
R132 "Res1" 0603 3190,3500 r90 top value=3
R133 "Res1" 0603 3950,3646.22 r270 top value=TBD
R134 "Res1" 0603 4007.5,3646.22 r270 top value=15k
R135 "Res1" 0603 4055,3646.22 r270 top value=10k
R136 "Res1" 0603 4215,2900 r90 top value=560
R137 "Res1" 0603 3700,3370 r0 top value=5.1
R138 "Res1" 0603 3970,2860 r90 top value=510
R139 "Res1" 0603 4210,2465 r90 top value=560
R140 "Res1" 0603 3860,2708.78 r90 top value=2.7k
R141 "Res1" 0603 3975,2636.22 r90 top value=2.2k
R142 "Res1" 0603 3870,3311.22 r90 top value=5.1
R143 "Res1" 0603 3860,2583.78 r90 top value=1k
R144 "Res1" 0603 4108.78,2535 r180 top value=1k
R145 "Res1" 0603 4105,2485 r180 top value=10k
R146 "Res1" 0603 3865,3479.64 r0 top value=470
R147 "Res1" 0603 3705,3492.28 r90 top value=62
R148 "Res1" 0603 3860,2446.22 r270 top value=4.7k
R149 "Res1" 0603 3970,2430 r0 top value=10k
R150 "Res1" 0603 3868.78,3529.82 r0 top value=470
R200 "Res1" 0603 3725,2133.78 r90 top value=68
R201 "Res1" 0603 3630,2028.78 r90 top value=100
R202 "Res1" 0603 3790,2031.22 r90 top value=100
R203 "Res1" 0603 3280,2153.78 r90 top value=TBD
R204 "Res1" 0603 3355,2150 r90 top value=10K
R205 "Res1" 0603 3320,2048.78 r90 top value=15K
R206 "Res1" 0603 3528.75,1411.22 r90 top value=10k
R207 "Res1" 0603 4085,1710 r90 top value=1k
R208 "Res1" 0603 3300,1395 r90 top value=10k
R209 "Res1" 0603 3528.75,1300 r90 top value=20k
R210 "Res1" 0603 3605,1398.78 r90 top value=200
R211 "Res1" 0603 3452.5,1300 r90 top value=10k
R212 "Res1" 0603 3376.25,1300 r90 top value=1K
R213 "Res1" 0603 4461.22,1495 r180 top value=1K
R214 "Res1" 0603 3605,1271.22 r90 top value=200
R215 "Res1" 0603 4461.22,1430 r180 top value=1K
R216 "Res1" 0603 4461.22,1365 r180 top value=1K
R217 "Res1" 0603 4461.22,1300 r180 top value=1K
R218 "Res1" 0603 3410,1068.78 r90 top value=1k
R219 "Res1" 0603 3546,1180 r90 top value=10k
R220 "Res1" 0603 3614,1068.78 r90 top value=20k
R221 "Res1" 0603 3478,1068.78 r90 top value=1.5k
R222 "Res1" 0603 3546,1070 r90 top value=56k
R223 "Res1" 0603 3682,1068.78 r90 top value=48.7k
R653 "Res1" 0603 2615,3605 r270 top value=1.5k
S1 "HDT0004" HDT0004 2727.76,2220.35 r0 top
S2 "HDT0004" HDT0004 3435,1730 r0 top
Y100 "ECS-75SMF45A30B" ECS75SMF45A30B 4400,3825 r270 top
Y101 "ECS-75SMF45A30B" ECS75SMF45A30B 4055,3860.04 r0 top
Y102 "ECS-75SMF45A30B" ECS75SMF45A30B 4389.96,3015 r270 top
Y103 "ECS-75SMF45A30B" ECS75SMF45A30B 4389.96,2570 r270 top

## Footprints (in the part's own frame and the unit in brackets; to place one, negate y for a bottom-side part, rotate by r counter-clockwise, add the part's x,y. Pads: shape width x height; smd on the part's side, far side on the other; paste and mask are expansions set on the pad)
0603 [mm] "Chip Inductor, Body 0.6x0.3mm, IPC High Density"
  rect 0.5x0.3 smd: 1(-0.35,0) 2(0.35,0)
  silkscreen extent -0.9,-0.05 -0.9,0.05, body extent -0.33,-0.18 0.33,0.18, height 0.55
AFS434S3 [mm]
  rect 2x0.6 smd: 1(2.784,3.233)
  rect 1x0.6 smd: 2(3.284,1.973) 3(3.284,0.694) 4(0.634,0.694) 5(0.634,1.965) 6(0.634,3.234)
  silkscreen extent 0.04,0.03 4.05,3.89
DIOM5436X247N [mm]
  rect 2.25x2.15 smd: 1(-2.2,0) 2(2.2,0)
  silkscreen extent -3.28,-1.81 2.7,1.81, body extent -2.7,-1.81 2.7,1.81, height 2.47
ECS75SMF45A30B [mm]
  rect 2.2x1.4 smd: 1(-2.9,-1.27) 3(2.9,-1.27) 4(2.9,1.27) 6(-2.9,1.27)
  rect 1.4x3.05 smd: 2(0,-1.525) 5(0,1.525)
  silkscreen extent -4.6,-2.55 3,-2.45, body extent -3.86,-2.91 3.86,13.05, height 10
FSI10506LDADTR [mm]
  rect 0.61x1.26 smd: 1(-2,4.73) 2(-2,-4.73) 3(-1,4.73) 4(-1,-4.73) 5(0,4.73) 6(0,-4.73) 7(1,4.73) 8(1,-4.73) 9(2,4.73) 10(2,-4.73)
  round 0.595 hole 1.19 unplated: MH1(-2,0) MH2(2,0)
  silkscreen extent -2.88,-4.51 2.88,6.2, body extent -2.88,-5.3 2.88,5.3, height 7.5
HDT0004 [mm]
  rect 1.2x0.8 smd: 1(-1.2,2.15) 2(1.2,2.15) 3(-1.2,-2.15) 4(1.2,-2.15)
  silkscreen extent -2.35,-2.25 2.35,3, body extent -2.35,-2.47 2.35,2.47, height 3.1
MQF326D [mm]
  rect 0.75x1.2 smd: 1(2.557,0.011) 3(-0.004,0.011) 4(2.557,1.611) 6(-0.004,1.611)
  rect 0.75x0.78 smd: 2(1.277,-0.199) 5(1.277,1.821)
  silkscreen extent -0.89,-0.88 3.4,2.5
MSS5131 [mm]
  rect 5.08x1.74 smd: 1(0,1.67) 2(0,-1.67)
  silkscreen extent -3.14,-0.4 2.55,1.78
QFN50P300X300X86-17N-D [mm]
  rect 0.8x0.25 smd: 1(-1.45,0.75) 2(-1.45,0.25) 3(-1.45,-0.25) 4(-1.45,-0.75) 5(-0.75,-1.45) 6(-0.25,-1.45) 7(0.25,-1.45) 8(0.75,-1.45) 9(1.45,-0.75) 10(1.45,-0.25) 11(1.45,0.25) 12(1.45,0.75) 13(0.75,1.45) 14(0.25,1.45) 15(-0.25,1.45) 16(-0.75,1.45)
  rect 1.75x1.75 smd: 17(0,0)
  silkscreen extent -1.97,1.38 -1.72,1.62, body extent -1.55,-1.55 1.55,1.55, height 0.85
QSH03001LDAK [mm]
  rect 0.279x2.27 smd: 1(-7.25,-2.865) 2(-7.25,2.865) 3(-6.75,-2.865) 4(-6.75,2.865) 5(-6.25,-2.865) 6(-6.25,2.865) 7(-5.75,-2.865) 8(-5.75,2.865) 9(-5.25,-2.865) 10(-5.25,2.865) 11(-4.75,-2.865) 12(-4.75,2.865) 13(-4.25,-2.865) 14(-4.25,2.865) 15(-3.75,-2.865) 16(-3.75,2.865) 17(-3.25,-2.865) 18(-3.25,2.865) 19(-2.75,-2.865) 20(-2.75,2.865) 21(-2.25,-2.865) 22(-2.25,2.865) 23(-1.75,-2.865) 24(-1.75,2.865) 25(-1.25,-2.865) 26(-1.25,2.865) 27(-0.75,-2.865) 28(-0.75,2.865) 29(-0.25,-2.865) 30(-0.25,2.865) 31(0.25,-2.865) 32(0.25,2.865) 33(0.75,-2.865) 34(0.75,2.865) 35(1.25,-2.865) 36(1.25,2.865) 37(1.75,-2.865) 38(1.75,2.865) 39(2.25,-2.865) 40(2.25,2.865) 41(2.75,-2.865) 42(2.75,2.865) 43(3.25,-2.865) 44(3.25,2.865) 45(3.75,-2.865) 46(3.75,2.865) 47(4.25,-2.865) 48(4.25,2.865) 49(4.75,-2.865) 50(4.75,2.865) 51(5.25,-2.865) 52(5.25,2.865) 53(5.75,-2.865) 54(5.75,2.865) 55(6.25,-2.865) 56(6.25,2.865) 57(6.75,-2.865) 58(6.75,2.865) 59(7.25,-2.865) 60(7.25,2.865)
  round 0.51 hole 1.02 unplated: MH1(-10.065,2.67) MH2(10.065,2.67)
  rect 2.54x0.43 smd: MP1(-8.065,0) MP2(8.065,0)
  rect 4.7x0.43 smd: MP3(-3.175,0) MP4(3.175,0)
  silkscreen extent -10.65,-4.6 10.66,2, body extent -10.66,-3.97 10.66,3.97, height 3.45
QTH03002LDA [mm]
  rect 0.305x1.45 smd: 1(-7.25,3.086) 2(-7.25,-3.086) 3(-6.75,3.086) 4(-6.75,-3.086) 5(-6.25,3.086) 6(-6.25,-3.086) 7(-5.75,3.086) 8(-5.75,-3.086) 9(-5.25,3.086) 10(-5.25,-3.086) 11(-4.75,3.086) 12(-4.75,-3.086) 13(-4.25,3.086) 14(-4.25,-3.086) 15(-3.75,3.086) 16(-3.75,-3.086) 17(-3.25,3.086) 18(-3.25,-3.086) 19(-2.75,3.086) 20(-2.75,-3.086) 21(-2.25,3.086) 22(-2.25,-3.086) 23(-1.75,3.086) 24(-1.75,-3.086) 25(-1.25,3.086) 26(-1.25,-3.086) 27(-0.75,3.086) 28(-0.75,-3.086) 29(-0.25,3.086) 30(-0.25,-3.086) 31(0.25,3.086) 32(0.25,-3.086) 33(0.75,3.086) 34(0.75,-3.086) 35(1.25,3.086) 36(1.25,-3.086) 37(1.75,3.086) 38(1.75,-3.086) 39(2.25,3.086) 40(2.25,-3.086) 41(2.75,3.086) 42(2.75,-3.086) 43(3.25,3.086) 44(3.25,-3.086) 45(3.75,3.086) 46(3.75,-3.086) 47(4.25,3.086) 48(4.25,-3.086) 49(4.75,3.086) 50(4.75,-3.086) 51(5.25,3.086) 52(5.25,-3.086) 53(5.75,3.086) 54(5.75,-3.086) 55(6.25,3.086) 56(6.25,-3.086) 57(6.75,3.086) 58(6.75,-3.086) 59(7.25,3.086) 60(7.25,-3.086)
  rect 4.7x0.64 smd: 61(-3.175,0) 62(3.175,0)
  rect 2.54x0.64 smd: 63(8.445,0) 64(-8.445,0)
  silkscreen extent -10,-3 10,4.25, body extent -10,-3.78 10,3.78, height 7.16
RF2637 [mm]
  rect 0.025x0.012 smd: 1(0,0) 2(0,-0.026) 3(0,-0.051) 4(0,-0.077) 5(0.171,-0.077) 6(0.171,-0.051) 7(0.171,-0.026) 8(0.171,0)
  silkscreen extent -0.12,-0.19 0.29,0.11
SOD3716X145N [mm]
  rect 1.2x0.75 smd: 1(-1.7,0) 2(1.7,0)
  silkscreen extent -2.3,-0.78 1.35,0.78, body extent -1.85,-0.77 1.85,0.77, height 1.45
SOIC127P599X175-8N [mm]
  rect 1.526x0.65 smd: 1(-2.712,1.905) 2(-2.712,0.635) 3(-2.712,-0.635) 4(-2.712,-1.905) 5(2.712,-1.905) 6(2.712,-0.635) 7(2.712,0.635) 8(2.712,1.905)
  silkscreen extent -3.47,-2.45 1.6,2.58, body extent -3,-2.45 3,2.45, height 1.75
SOIC127P600X175-8N [mm]
  rect 1.525x0.65 smd: 1(-2.712,1.905) 2(-2.712,0.635) 3(-2.712,-0.635) 4(-2.712,-1.905) 5(2.712,-1.905) 6(2.712,-0.635) 7(2.712,0.635) 8(2.712,1.905)
  silkscreen extent -3.48,-2.45 1.6,2.58, body extent -3,-2.45 3,2.45, height 1.75
SOIC127P600X175-14N [mm]
  rect 1.525x0.65 smd: 1(-2.712,3.81) 2(-2.712,2.54) 3(-2.712,1.27) 4(-2.712,0) 5(-2.712,-1.27) 6(-2.712,-2.54) 7(-2.712,-3.81) 8(2.712,-3.81) 9(2.712,-2.54) 10(2.712,-1.27) 11(2.712,0) 12(2.712,1.27) 13(2.712,2.54) 14(2.712,3.81)
  silkscreen extent -3.48,-4.33 1.6,4.48, body extent -3,-4.33 3,4.33, height 1.75
SON50P300X300X80-9N-D [mm]
  rect 0.8x0.3 smd: 1(-1.5,0.75) 2(-1.5,0.25) 3(-1.5,-0.25) 4(-1.5,-0.75) 5(1.5,-0.75) 6(1.5,-0.25) 7(1.5,0.25) 8(1.5,0.75)
  rect 1.75x2.48 smd: 9(0,0)
  silkscreen extent -2.02,1.28 -1.77,1.52, body extent -1.55,-1.5 1.55,1.5, height 0.8
SON50P300X400X85-13N-D [mm]
  rect 0.8x0.3 smd: 1(-1.5,1.25) 2(-1.5,0.75) 3(-1.5,0.25) 4(-1.5,-0.25) 5(-1.5,-0.75) 6(-1.5,-1.25) 7(1.5,-1.25) 8(1.5,-0.75) 9(1.5,-0.25) 10(1.5,0.25) 11(1.5,0.75) 12(1.5,1.25)
  rect 1.8x3.4 smd: 13(0,0)
  silkscreen extent -2.02,1.78 -1.77,2.02, body extent -1.55,-2 1.55,2, height 0.85
SOT65P210X110-5N [mm]
  rect 1.05x0.4 smd: 1(-0.95,0.65) 2(-0.95,0) 3(-0.95,-0.65) 4(0.95,-0.65) 5(0.95,0.65)
  silkscreen extent -1.47,-1 0.07,1.1, body extent -1.05,-1 1.05,1, height 1.1
SOT95P270X145-5N [mm]
  rect 1.4x0.6 smd: 1(-1.25,0.95) 2(-1.25,0) 3(-1.25,-0.95) 4(1.25,-0.95) 5(1.25,0.95)
  silkscreen extent -1.95,-1.45 0.2,1.5, body extent -1.35,-1.45 1.35,1.45, height 1.45
SOT95P280X100-6N [mm]
  rect 1.05x0.55 smd: 1(-1.3,0.95) 2(-1.3,0) 3(-1.3,-0.95) 4(1.3,-0.95) 5(1.3,0) 6(1.3,0.95)
  silkscreen extent -1.82,-1.45 0.42,1.58, body extent -1.4,-1.45 1.4,1.45, height 1
SOT95P280X110-6N [mm]
  rect 1.2x0.6 smd: 1(-1.25,0.95) 2(-1.25,0) 3(-1.25,-0.95) 4(1.25,-0.95) 5(1.25,0) 6(1.25,0.95)
  silkscreen extent -1.85,-1.45 0.3,1.6, body extent -1.4,-1.45 1.4,1.45, height 1.1
SOT95P280X145-5N [mm]
  rect 1.2x0.6 smd: 1(-1.25,0.95) 2(-1.25,0) 3(-1.25,-0.95) 4(1.25,-0.95) 5(1.25,0.95)
  silkscreen extent -1.85,-1.45 0.3,1.5, body extent -1.4,-1.45 1.4,1.45, height 1.45
SOT95P280X159-5N [mm]
  rect 1.2x0.6 smd: 1(-1.25,0.95) 2(-1.25,0) 3(-1.25,-0.95) 4(1.25,-0.95) 5(1.25,0.95)
  silkscreen extent -1.85,-1.45 0.3,1.5, body extent -1.4,-1.45 1.4,1.45, height 1.59
SOT230P700X180-4N [mm]
  rect 1.35x0.95 smd: 1(-3.35,2.3) 2(-3.35,0) 3(-3.35,-2.3)
  rect 1.35x3.25 smd: 4(3.35,0)
  silkscreen extent -4.02,-3.25 1.75,3.25, body extent -3.5,-3.25 3.5,3.25, height 1.8

## Part data
*100 *101 IC112 IC113 IC900: library part Component_1
C1 C2 C3 C4 C6 C8 C9 C11 C12 C13 C14 C15 C16 C17 C18 C19 C20 C21 C23 C25 C27 C28 C29 C30 C31 C32 C34 C36 C37 C38 C39 C40 C41 C42 C43 C44 C45 C46 C47 C48 C49 C50 C51 C52 C53 C54 C55 C56 C57 C58 C59 C60 C61 C62 C63 C64 C65 C66 C67 C68 C69 C139 C140 C141 C142 C143 C144 C145 C146 C147 C148 C149 C150 C151 C152 C153 C154 C155 C156 C157 C158 C159 C160 C161 C162 C163 C164 C165 C166 C167 C168 C169 C170 C171 C172 C173 C174 C175 C200 C201 C202 C203 C204 C205 C206 C207 C208 C209 C210 C211 C212 C213 C214 C215 C650 C651 C?: "Capacitor", LatestRevisionDate=17-Jul-2002, LatestRevisionNote="Re-released for DXP Platform.", PackageDescription="Radial Cap, Thru-Hole; 2 Leads; 0.3 in Pin Spacing", PackageReference=RAD-0.3, Published=8-Jun-2000, Publisher="Altium Limited"
D6: "Diode", Manufacturer_Name="ON Semiconductor", Mouser Part Number=863-MBRS120T3G, RS Part Number=5452068P, Allied Price/Stock=http://www.alliedelec.com/on-semiconductor-mbrs120t3g/70339713/, Allied_Number=70339713, Datasheet Link=http://www.onsemi.com/pub/Collateral/MBRS120T3-D.PDF, Height=2.47mm, Manufacturer_Part_Number=MBRS120T3G, Mouser Price/Stock=https://www.mouser.com/Search/Refine.aspx?Keyword=863-MBRS120T3G, RS Price/Stock=http://uk.rs-online.com/web/p/products/5452068P
D?: "Diode", Manufacturer_Name="Diodes Inc.", Mouser Part Number=621-BAT46W-7-F, RS Part Number=7513373P, Allied Price/Stock=https://www.alliedelec.com/diodes-inc-bat46w-7-f/71028110/, Allied_Number=71028110, Datasheet Link=https://componentsearchengine.com/Datasheets/2/BAT46W-7-F.pdf, Height=1.45mm, Manufacturer_Part_Number=BAT46W-7-F, Mouser Price/Stock=https://www.mouser.com/Search/Refine.aspx?Keyword=621-BAT46W-7-F, RS Price/Stock=http://uk.rs-online.com/web/p/products/7513373P
IC1 IC3: "Integrated Circuit", Manufacturer_Name=Qorvo, Mouser Part Number=772-RFPA0133, Datasheet Link=http://www.qorvo.com/products/d/da000936, Height=0.855mm, Manufacturer_Part_Number=RFPA0133TR7, Mouser Price/Stock=https://www.mouser.com/Search/Refine.aspx?Keyword=772-RFPA0133
IC2 IC4 IC1000: "Integrated Circuit", Manufacturer_Name=RFMD, Datasheet Link=https://datasheet.octopart.com/RF2878SR-RFMD-datasheet-17020116.pdf, Height=1.59mm, Manufacturer_Part_Number=RF2878SR
IC5: "Integrated Circuit", Manufacturer_Name="Linear Technology", Datasheet Link=https://componentsearchengine.com/Datasheets/2/LTC5533EDE#PBF.pdf, Height=0.85mm, Manufacturer_Part_Number=LTC5533EDE#PBF
IC6 IC14 IC110: "Integrated Circuit", Manufacturer_Name="ON Semiconductor", Mouser Part Number=512-FPF2000, RS Part Number=6709942P, Datasheet Link=https://www.onsemi.com/pub/Collateral/FPF2001-D.pdf, Height=1.1mm, Manufacturer_Part_Number=FPF2000, Mouser Price/Stock=https://www.mouser.com/Search/Refine.aspx?Keyword=512-FPF2000, RS Price/Stock=http://uk.rs-online.com/web/p/products/6709942P
IC7: "Integrated Circuit", Manufacturer_Name="Linear Technology", Mouser Part Number=584-LTC1772CS6TRMPBF, RS Part Number=0411891, Datasheet Link=http://docs-emea.rs-online.com/webdocs/0ab8/0900766b80ab84d2.pdf, Height=1mm, Manufacturer_Part_Number=LTC1772CS6#TRMPBF, Mouser Price/Stock=https://www.mouser.com/Search/Refine.aspx?Keyword=584-LTC1772CS6TRMPBF, RS Price/Stock=http://uk.rs-online.com/web/p/products/0411891
IC8 IC9: "Integrated Circuit", Manufacturer_Name=Microchip, Manufacturer_Part_Number=MCP6231UT-E/OT, Mouser Part Number=579-MCP6231UT-E/OT, RS Part Number=6674468, Allied Price/Stock=http://www.alliedelec.com/microchip-technology-inc-mcp6231ut-e-ot/70414221/, Allied_Number=70414221, Datasheet Link=http://ww1.microchip.com/downloads/en/DeviceDoc/21881e.pdf, Height=1.45mm, Mouser Price/Stock=https://www.mouser.com/Search/Refine.aspx?Keyword=579-MCP6231UT-E%2FOT, RS Price/Stock=https://uk.rs-online.com/web/p/products/6674468
IC10 IC18: "Integrated Circuit", Manufacturer_Name="Linear Technology", Mouser Part Number=584-1963AES8-3.3PBF, RS Part Number=7618550P, Datasheet Link=http://www.linear.com/docs/3709, Height=1.752mm, Manufacturer_Part_Number=LT1963AES8-3.3#PBF, Mouser Price/Stock=https://www.mouser.com/Search/Refine.aspx?Keyword=584-1963AES8-3.3PBF, RS Price/Stock=http://uk.rs-online.com/web/p/products/7618550P
IC11 IC13: "Integrated Circuit", Manufacturer_Name="Texas Instruments", Mouser Part Number=595-SN74HC00D, RS Part Number=0526234, Datasheet Link=http://www.ti.com/lit/gpn/sn74hc00, Height=1.75mm, Manufacturer_Part_Number=SN74HC00D, Mouser Price/Stock=https://www.mouser.com/Search/Refine.aspx?Keyword=595-SN74HC00D, RS Price/Stock=http://uk.rs-online.com/web/p/products/0526234
IC12: "Integrated Circuit", Manufacturer_Name="ON Semiconductor", Mouser Part Number=512-MM74HC02M, RS Part Number=7613555P, Datasheet Link=https://www.fairchildsemi.com/datasheets/MM/MM74HC02.pdf, Height=1.75mm, Manufacturer_Part_Number=MM74HC02M, Mouser Price/Stock=https://www.mouser.com/Search/Refine.aspx?Keyword=512-MM74HC02M, RS Price/Stock=http://uk.rs-online.com/web/p/products/7613555P
IC15: "Integrated Circuit", Manufacturer_Name="Analog Devices", Mouser Part Number=584-TMP36GRTZ-R7, RS Part Number=8099367P, Datasheet Link=http://componentsearchengine.com/Datasheets/3/TMP36GRTZ-REEL7.pdf, Height=1.45mm, Manufacturer_Part_Number=TMP36GRTZ-REEL7, Mouser Price/Stock=https://www.mouser.com/Search/Refine.aspx?Keyword=584-TMP36GRTZ-R7, RS Price/Stock=http://uk.rs-online.com/web/p/products/8099367P
IC16: "Integrated Circuit", Manufacturer_Name="Texas Instruments", Mouser Part Number=595-INA194AIDBVT, RS Part Number=5457625P, Datasheet Link=http://www.ti.com/lit/ds/symlink/ina194.pdf, Height=1.45mm, Manufacturer_Part_Number=INA194AIDBVT, Mouser Price/Stock=https://www.mouser.com/Search/Refine.aspx?Keyword=595-INA194AIDBVT, RS Price/Stock=http://uk.rs-online.com/web/p/products/5457625P
IC17: "Integrated Circuit", Manufacturer_Name="ON Semiconductor", Mouser Part Number=512-FPF2700MX, RS Part Number=8088966P, Datasheet Link=https://www.onsemi.com/pub/Collateral/FPF2702-D.pdf, Height=1.75mm, Manufacturer_Part_Number=FPF2700MX, Mouser Price/Stock=https://www.mouser.com/Search/Refine.aspx?Keyword=512-FPF2700MX, RS Price/Stock=http://uk.rs-online.com/web/p/products/8088966P
IC103 IC108: "Integrated Circuit", Manufacturer_Name="Linear Technology", Mouser Part Number=584-LT1963EST-2.5, Datasheet Link=https://www.mouser.com/datasheet/2/609/1963fc-1270290.pdf, Height=1.8mm, Manufacturer_Part_Number=LT1963EST-2.5, Mouser Price/Stock=https://www.mouser.com/Search/Refine.aspx?Keyword=584-LT1963EST-2.5
IC109 IC114: "Integrated Circuit", Manufacturer_Name="Linear Technology", Mouser Part Number=584-LT5560EDD#PBF, RS Part Number=7869705, Datasheet Link=https://www.analog.com/media/en/technical-documentation/data-sheets/5560f.pdf, Height=0.8mm, Manufacturer_Part_Number=LT5560EDD#PBF, Mouser Price/Stock=https://www.mouser.com/Search/Refine.aspx?Keyword=584-LT5560EDD%23PBF, RS Price/Stock=https://uk.rs-online.com/web/p/products/7869705
IC111: "Integrated Circuit", Manufacturer_Name="ON Semiconductor", Mouser Part Number=512-FPF2004, RS Part Number=8088916P, Datasheet Link=https://www.onsemi.com/pub/Collateral/FPF2001-D.pdf, Height=1.1mm, Manufacturer_Part_Number=FPF2004, Mouser Price/Stock=https://www.mouser.com/Search/Refine.aspx?Keyword=512-FPF2004, RS Price/Stock=http://uk.rs-online.com/web/p/products/8088916P
IC115: "Integrated Circuit", Manufacturer_Name=Microchip, Manufacturer_Part_Number=MCP6231UT-E/LT, Mouser Part Number=579-MCP6231UT-E/LT, RS Part Number=7240643P, Allied Price/Stock=http://www.alliedelec.com/microchip-technology-inc-mcp6231ut-e-lt/70414866/, Allied_Number=70414866, Datasheet Link=http://ww1.microchip.com/downloads/en/DeviceDoc/21881e.pdf, Height=1.1mm, Mouser Price/Stock=https://www.mouser.com/Search/Refine.aspx?Keyword=579-MCP6231UT-E%2FLT, RS Price/Stock=http://uk.rs-online.com/web/p/products/7240643P
J1: "Connector", Manufacturer_Name=SAMTEC, Mouser Part Number=200-QSH03001LDAK, RS Part Number=1587735, Datasheet Link=http://suddendocs.samtec.com/prints/qsh-xxx-01-x-d-xxx-mkt.pdf, Height=3.35mm, Manufacturer_Part_Number=QSH-030-01-L-D-A-K, Mouser Price/Stock=https://www.mouser.com/Search/Refine.aspx?Keyword=200-QSH03001LDAK, RS Price/Stock=http://uk.rs-online.com/web/p/products/1587735
J2: "Connector", Manufacturer_Name=SAMTEC, Mouser Part Number=200-QTH03002LDA, RS Part Number=7678748P, Datasheet Link=http://suddendocs.samtec.com/prints/qth-xxx-xx-x-d-xxx-mkt.pdf, Height=7.064mm, Manufacturer_Part_Number=QTH-030-02-L-D-A, Mouser Price/Stock=https://www.mouser.com/Search/Refine.aspx?Keyword=200-QTH03002LDA, RS Price/Stock=http://uk.rs-online.com/web/p/products/7678748P
J?: "Connector", Manufacturer_Name=SAMTEC, Datasheet Link=http://suddendocs.samtec.com/prints/fsi-1xx-xx-xxx-d-x-xx-xx-mkt.pdf, Height=7.4mm, Manufacturer_Part_Number=FSI-105-06-L-D-AD-TR
L18: "Inductor", Manufacturer_Name=COILCRAFT, Mouser Part Number=994-MSS5131-472MLB, Datasheet Link=http://www.coilcraft.com/pdfs/mss5131.pdf, Manufacturer_Part_Number=MSS5131-472MLB, Mouser Price/Stock=https://www.mouser.com/Search/Refine.aspx?Keyword=994-MSS5131-472MLB
L19: "Inductor", Manufacturer_Name=COILCRAFT, Mouser Part Number=994-MSS5131-103MLB, Datasheet Link=https://componentsearchengine.com/Datasheets/1/MSS5131-103MLB.pdf, Manufacturer_Part_Number=MSS5131-103MLB, Mouser Price/Stock=https://www.mouser.com/Search/Refine.aspx?Keyword=994-MSS5131-103MLB
Q1: "Integrated Circuit", Manufacturer_Name="ON Semiconductor", Mouser Part Number=512-FDC638P, RS Part Number=7614413, Datasheet Link=http://docs-emea.rs-online.com/webdocs/10e2/0900766b810e24f1.pdf, Height=1.1mm, Manufacturer_Part_Number=FDC638P, Mouser Price/Stock=https://www.mouser.com/Search/Refine.aspx?Keyword=512-FDC638P, RS Price/Stock=https://uk.rs-online.com/web/p/products/7614413
R1 R2 R3 R4 R5 R6 R7 R8 R9 R10 R11 R12 R13 R14 R15 R16 R17 R18 R19 R20 R21 R22 R23 R24 R25 R26 R27 R28 R29 R30 R31 R32 R33 R34 R35 R36 R37 R38 R39 R40 R41 R42 R126 R127 R128 R129 R130 R131 R132 R133 R134 R135 R136 R137 R138 R139 R140 R141 R142 R143 R144 R145 R146 R147 R148 R149 R150 R200 R201 R202 R203 R204 R205 R206 R207 R208 R209 R210 R211 R212 R213 R214 R215 R216 R217 R218 R219 R220 R221 R222 R223 R653: "Resistor", LatestRevisionDate=17-Jul-2002, LatestRevisionNote="Re-released for DXP Platform.", PackageDescription="Axial Device, Thru-Hole; 2 Leads; 0.3 in Pin Spacing", PackageReference=AXIAL-0.3, Published=8-Jun-2000, Publisher="Altium Limited"
S1 S2: "Switch", Manufacturer_Name="C & K COMPONENTS", Mouser Part Number=611-HDT0004, RS Part Number=7931608P, Datasheet Link=https://www.ckswitches.com/media/1307/hdt.pdf, Height=3mm, Manufacturer_Part_Number=HDT0004, Mouser Price/Stock=https://www.mouser.com/Search/Refine.aspx?Keyword=611-HDT0004, RS Price/Stock=http://uk.rs-online.com/web/p/products/7931608P
Y100 Y101 Y102 Y103: "Crystal or Oscillator", Manufacturer_Name=ECS, Mouser Part Number=520-ECS-75SMF45A30B, Datasheet Link=https://www.mouser.com/datasheet/2/122/ECS_75SMF-10007.pdf, Height=0.95mm, Manufacturer_Part_Number=ECS-75SMF45A30B, Mouser Price/Stock=https://www.mouser.com/Search/Refine.aspx?Keyword=520-ECS-75SMF45A30B
L1 L2 L3 L4 L5 L6 L7 L8 L9 L10 L11 L12 L13 L14 L15 L16 L17 L117 L118 L119 L120 L121 L122 L123 L124 L125 L126 L127 L128 L129 L130 L131 L132 L133 L200 L201 L202: Code_IEC=1005, Code_JEITA=0402, LatestRevisionDate=29-May-2009, LatestRevisionNote="IPC-7351 Footprint Added.", PackageDescription="Chip Inductor", PackageReference=0402-A, Published=8-Jun-2000, Publisher="Altium Limited"

## Via types
v1: diameter 50, hole 28, Top Layer to Bottom Layer, 203 vias

## Nets (pads, with @x,y where several pads share a name; then routed paths per layer and width w, separated by ;. In a path a pad name is that pad's centre, name@x,y a point inside that pad or via, vN(x,y) a via of type N, cw(c..) or ccw(c..) an arc to the next point about the centre after c; other vN are vias at no path point)
2.5V_1: *100.2 *100.6 C139.1 C147.2 C148.2 IC108.3 R126.1 R127.1 | length 2092.1
  Top Layer w10: C147.2@3170,3308.78 3170,3320 3235,3385 C148.2@3245,3385 ; C148.2@3245,3388.78 C148.2@3245,3385 ; IC108.3@3313.11,3344.45 IC108.3@3314,3344.45 ; C139.1@3360,3965 3360,3938.44 3357.56,3936 R126.1@3357.56,3910 R126.1@3358,3910 ; v1(3421,3865) 3376,3910 R126.1@3358,3910 ; *100.2@3550,3915 3575,3915 3575,3843 3600.44,3843 *100.6@3600.44,3843.72 3626,3853 3626,3960 3652,3986 3805,3986 v1(3830,3961) ; C148.2@3245,3385 3300,3385 3314,3371 IC108.3@3314,3344.45 ; IC108.3@3314,3344.45 3342.45,3344.45 3378,3380 3378,3600 3355,3623 3236,3623 3219,3640 3219,3693 3355,3829 R127.1@3355,3840 3358,3840 R126.1@3358,3910
  Layer 1 w10: v1(3421,3865) 3734,3865 v1(3830,3961)
2.5V_2: *100.3 *101.2 *101.3 *101.6 C1.1 C2.1 C3.1 C4.1 C6.1 C8.1 C9.1 C14.2 C15.1 C16.1 C18.2 C19.2 C20.2 C21.2 C23.2 C27.2 C28.1 C29.1 C30.2 C34.2 C36.2 C37.2 C38.2 C39.2 C40.2 C41.2 C42.2 C43.1 C44.2 C45.2 C46.2 C47.2 C48.2 C49.2 C50.1 C52.2 C53.2 C54.1 C55.1 C56.1 C57.2 C58.1 C59.2 C60.2 C61.1 C62.1 C63.2 C64.2 C65.2 C66.2 C67.1 C68.2 C69.1 C139.2 C140.1 C142.1 C144.1 C145.1 C146.1 C146.2 C147.1 C148.1 C150.2 C152.1 C156.1 C158.1 C159.2 C160.1 C160.2 C161.1 C162.1 C163.1 C164.1 C165.1 C167.1 C169.1 C171.1 C172.2 C173.1 C174.2 C175.2 C201.1 C203.2 C204.1 C205.2 C206.2 C207.2 C208.2 C209.2 C210.2 C211.2 C213.2 C214.2 C?.1 C?.2 D6.1 IC1.2 IC1.9 IC1.10 IC2.2 IC2.5 IC3.2 IC3.9 IC3.10 IC4.2 IC4.5 IC5.6 IC5.8 IC5.11 IC5.13 IC6.2 IC7.2 IC8.5 IC9.5 IC10.3 IC10.6 IC10.7 IC11.7 IC12.7 IC12.8 IC12.9 IC13.7 IC14.2 IC15.3 IC15.5 IC16.2 IC17.5 IC17.6 IC18.3 IC18.6 IC18.7 IC103.2 IC103.3 IC103.4 IC108.2 IC108.4 IC110.2 IC111.2 IC112.3 IC113.1 IC113.3 IC113.4 IC113.6 IC114.9 IC115.2 IC900.3 IC1000.4 J?.3 L3.1 L7.1 L12.2 L14.1 L119.1 R4.2 R9.2 R10.1 R12.1 R12.2 R19.2 R23.2 R24.1 R28.1 R29.1 R32.1 R33.1 R36.2 R40.2 R42.1 R128.1 R132.1 R133.1 R134.1 R135.1 R137.1 R140.2 R142.2 R145.2 R201.1 R202.2 R205.1 R212.2 R221.1 R223.1 S1.3 S1.4 S2.3 S2.4 Y100.1 Y100.4 Y101.4 Y101.6 Y102.1 Y103.1 Y103.4 | length 44178.6